# EAGLE board ptzlanc9 (EAGLE 5.06), part 1 of 3
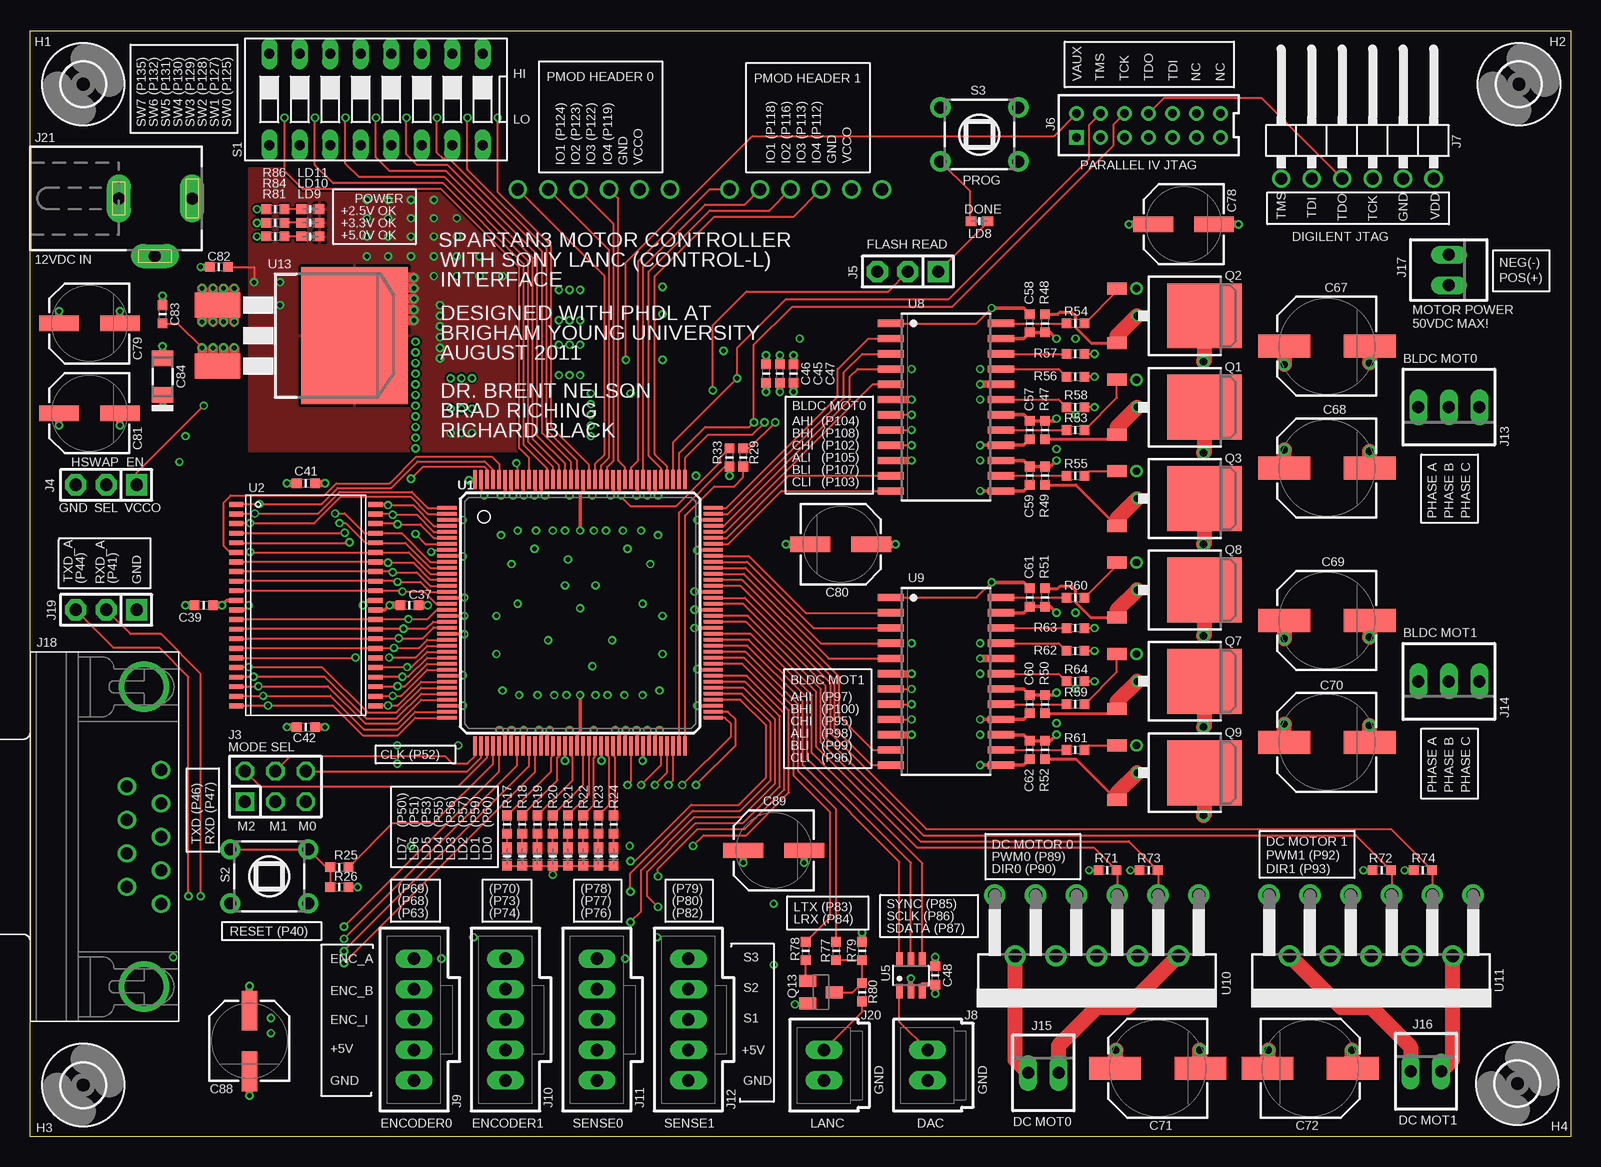
[diagram p0: board, top side]
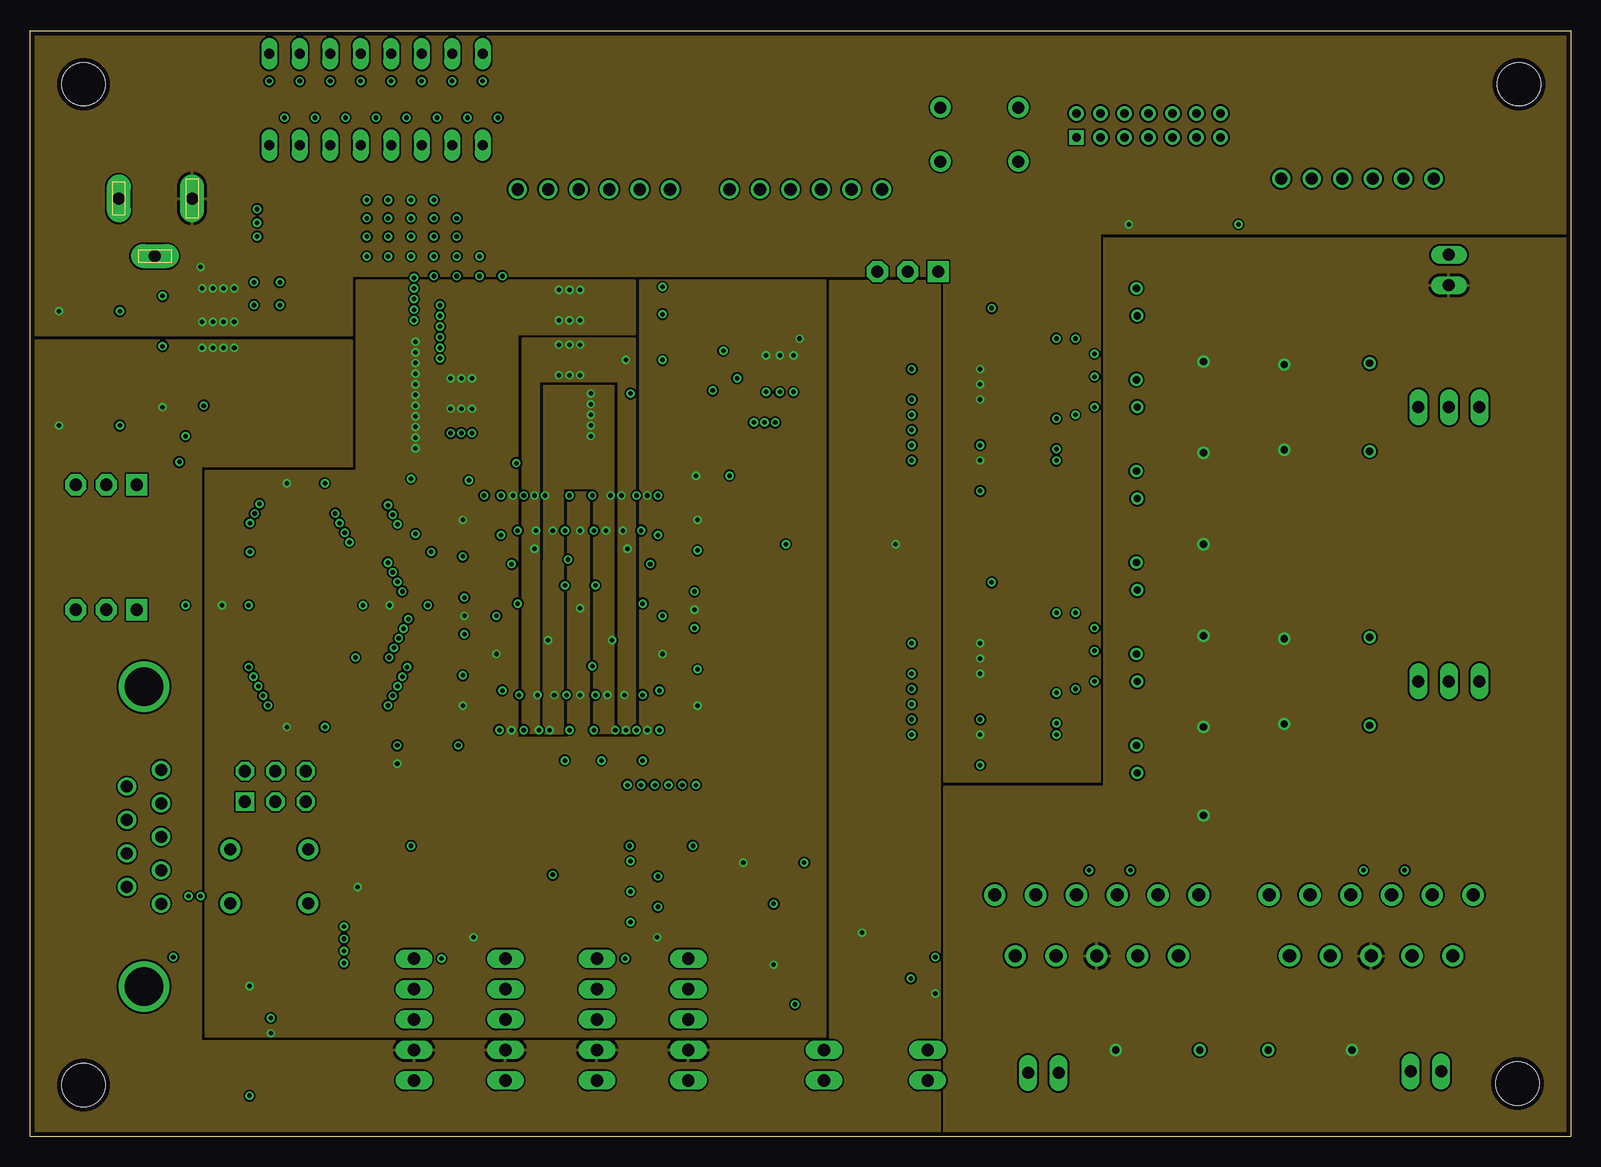
[diagram p1: board, inner layer Power]
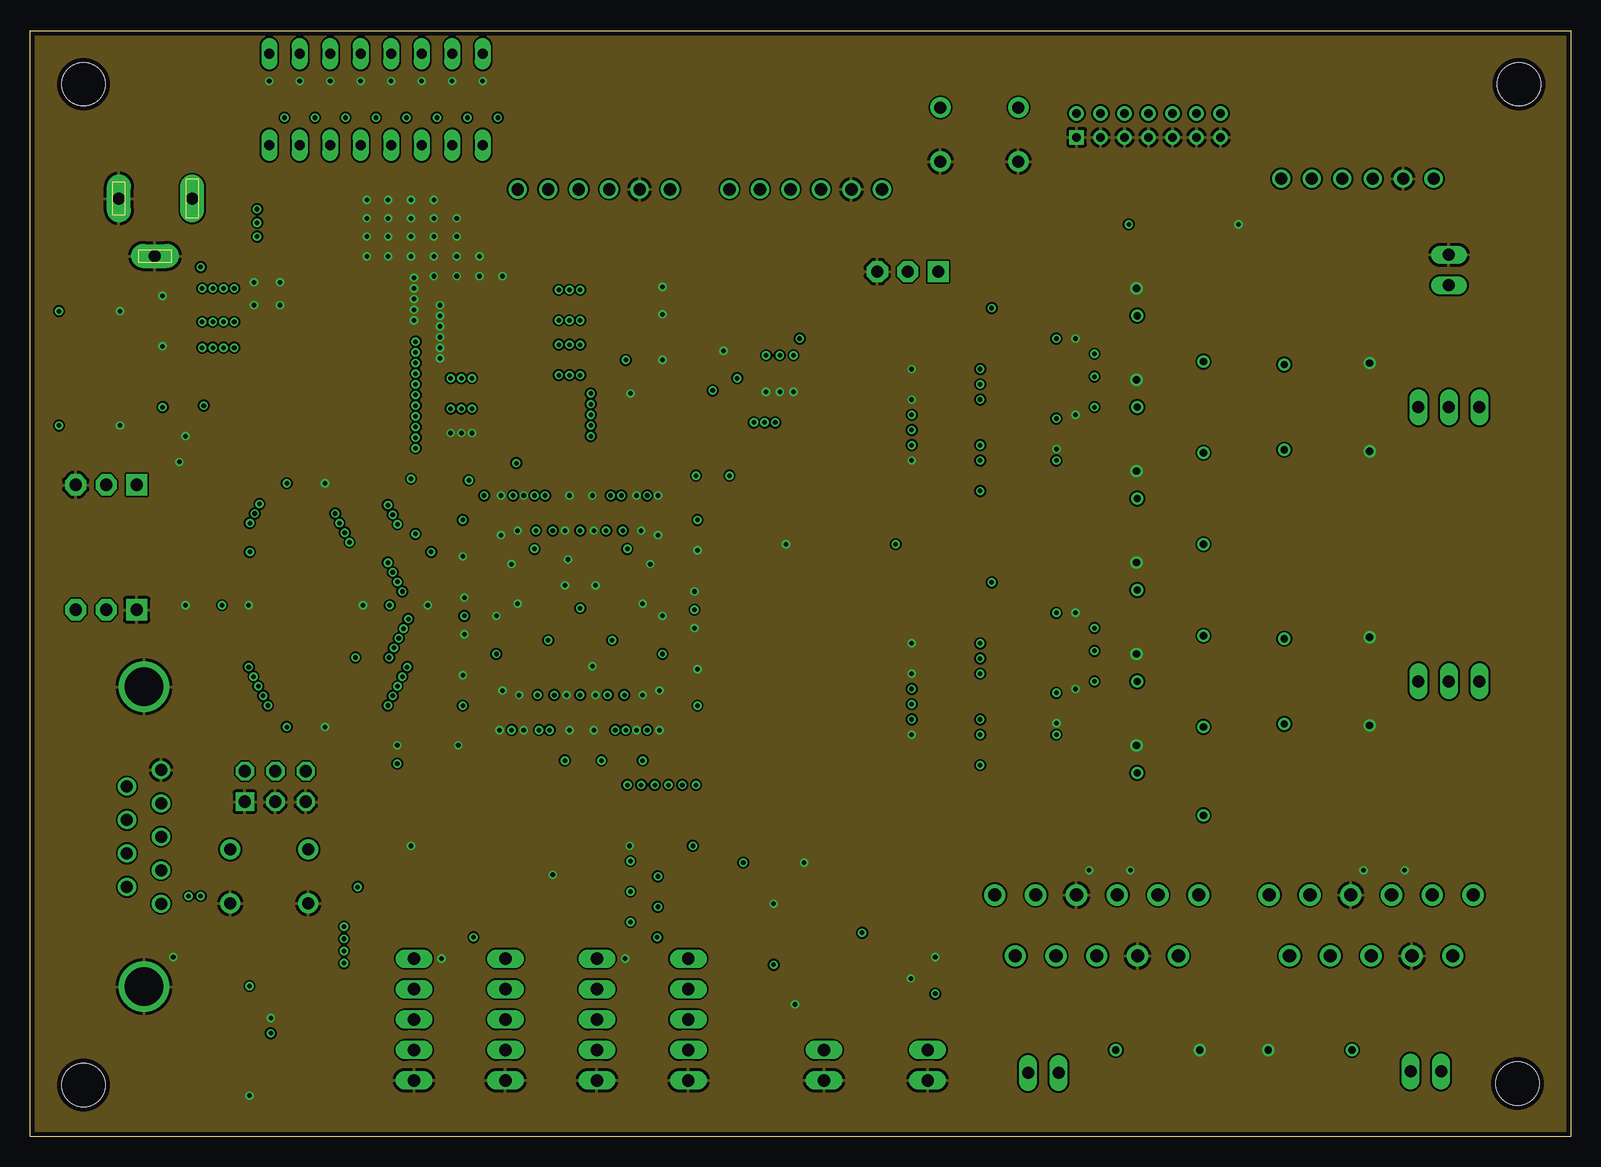
[diagram p2: board, inner layer Ground]
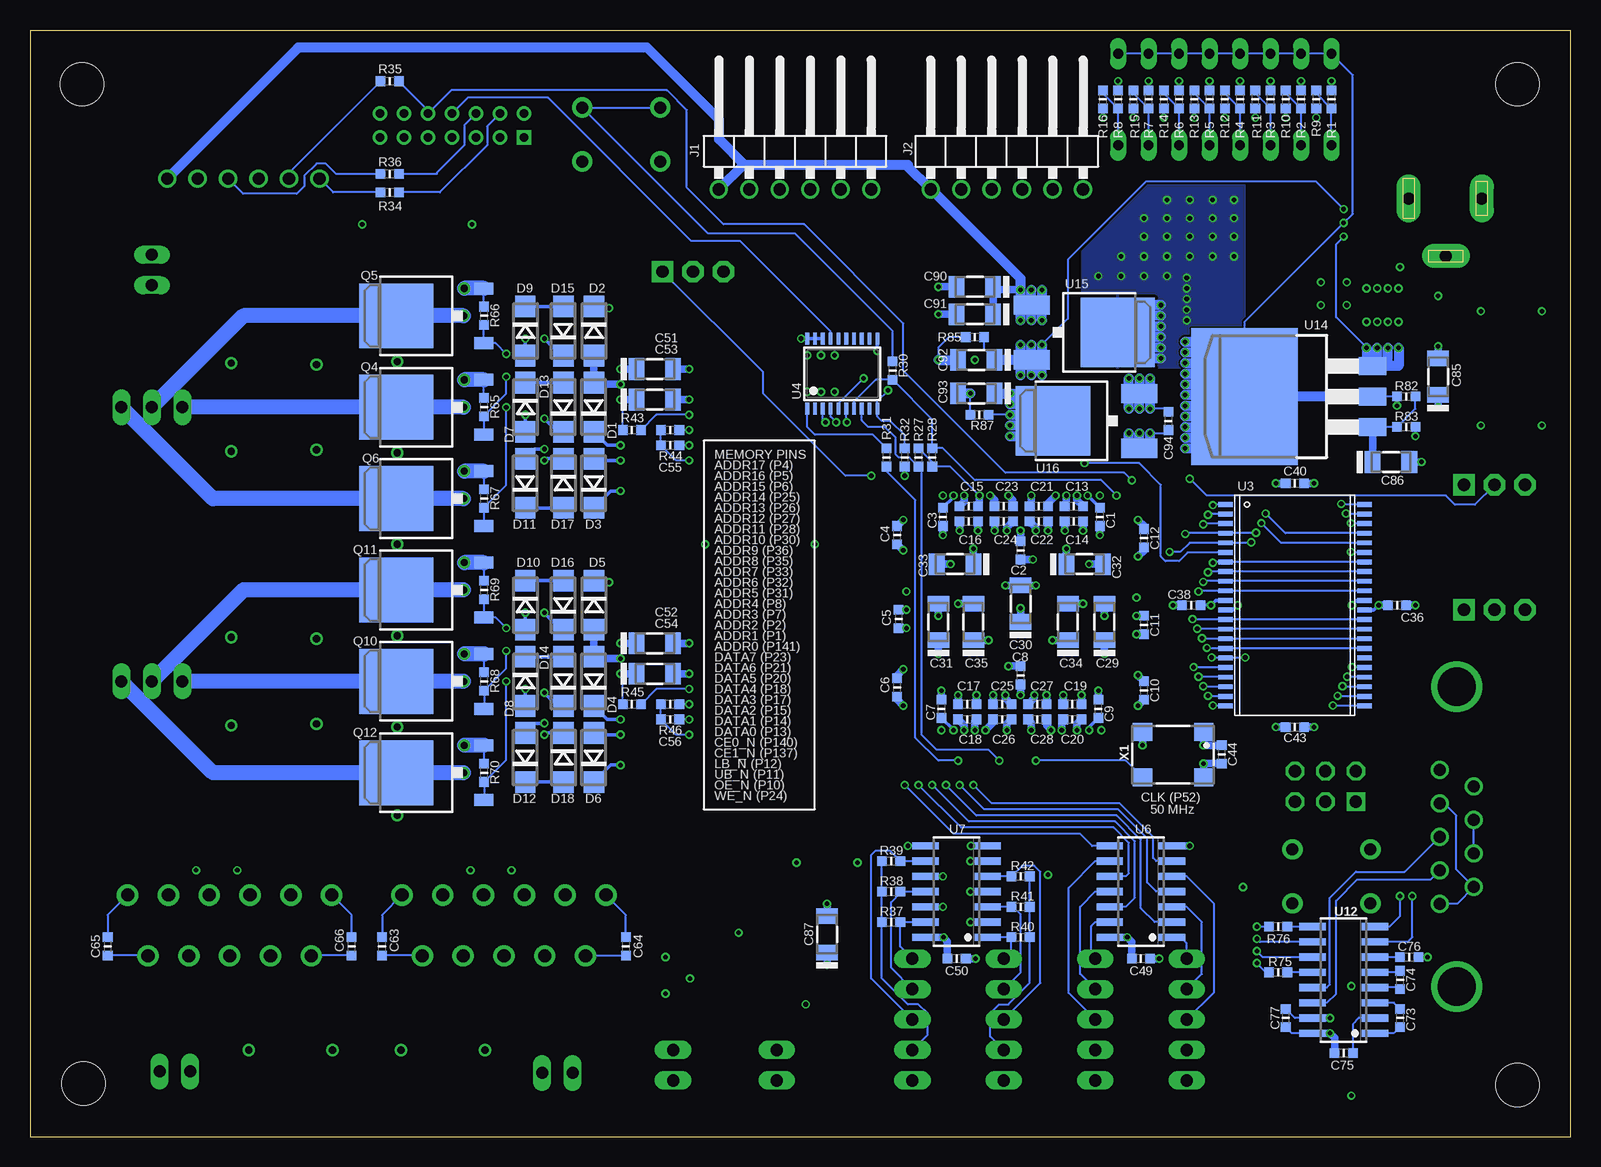
[diagram p3: board, bottom side, seen from below]

Size 128.4 x 92.2 mm. Coordinates in mm from the lower left corner, seen from the top.
Outline: 0,0 0,92.2 128.4,92.2 128.4,0 0,0
Copper layers (1+2*3+16): Top 0.0356mm / dielectric 0.254mm / Power 0.0356mm / dielectric 0.9906mm / Ground 0.0356mm / dielectric 0.254mm / Bottom 0.0356mm
Design rules "Advanced-Circuits-66Special-4layer *": minimum track width 6mil, minimum drill 15mil, track to track 6mil, track to pad 6mil, pad to pad 6mil, via to via 6mil, smd to smd 0mil, copper to edge 15mil, drill to drill 15mil, minimum pad ring 10mil, minimum via ring 6mil, stop-mask expansion 0mil, vias tented up to drill 0mil, thermal gap 10mil

## Footprints (pad centres in the part's own frame; a part is rotated, then mirrored left to right if it is on the bottom)
C0603MP = smd 0.8 x 0.8: 1 -0.762,0; 2 0.762,0
C1206MP/T = smd 1.3 x 1.8: + 1.524,0; - -1.524,0
CSV-E/F = smd 4.318 x 1.93: + -3.556,0; - 3.556,0
CSV-D = smd 3.302 x 1.27: + -2.54,0; - 2.54,0
DO214AC = smd 1.8 x 1.7: A 2.05,0; C -2.05,0
3,6 = hole 3.6: 0,0
1X06/90 = drill 1.016 round: 1 -6.35,-3.81; 2 -3.81,-3.81; 3 -1.27,-3.81; 4 1.27,-3.81; 5 3.81,-3.81; 6 6.35,-3.81
DIL-100-2X03 = drill 1.016 square: 1 -2.54,-1.27 | drill 1.016 octagon: 2 -2.54,1.27; 3 0,-1.27; 4 0,1.27; 5 2.54,-1.27; 6 2.54,1.27
SIP-100-03-40 = drill 1.016 pad 1.778 square: 1 -2.54,0 | drill 1.016 pad 1.778 octagon: 2 0,0; 3 2.54,0
79107-14 = drill 0.711 square: 1 -6,-1 | drill 0.711 round: 2 -6,1; 3 -4,-1; 4 -4,1; 5 -2,-1; 6 -2,1; 7 0,-1; 8 0,1; 9 2,-1; 10 2,1; 11 4,-1; 12 4,1; 13 6,-1; 14 6,1
70543-02 = drill 1.016 long: 1 -1.27,0; 2 1.27,0
70543-05 = drill 1.016 long: 1 -5.08,0; 2 -2.54,0; 3 0,0; 4 2.54,0; 5 5.08,0
22-23-2031 = drill 1 long: 1 -2.54,0; 2 0,0; 3 2.54,0
22-23-2021 = drill 1 long: 1 -1.27,0; 2 1.27,0
09HP = drill 1 round: 1 -5.58,-10.92; 2 -2.79,-10.92; 3 0,-10.92; 4 2.79,-10.92; 5 5.58,-10.92; 6 -4.185,-8.08; 7 -1.395,-8.08; 8 1.395,-8.08; 9 4.185,-8.08 | drill 3.2 round: G1 -12.5,-9.5; G2 12.5,-9.5
DCJ0202 = drill 1 pad 2 long: 1 0,3.1; 2 4.8,0; 3 0,-3
0603MP = smd 0.8 x 0.8: A -0.762,0; C 0.762,0
TO252 = smd 1 x 1.6: 1 -2.28,-4.8; 2 2.28,-4.8 | smd 5.4 x 6.2: 3 0,2.5
SOT23-BEC = smd 1 x 1.4: B -0.95,-1.1; C 0,1.1; E 0.95,-1.1
R0603MP = smd 0.8 x 0.8: 1 -0.762,0; 2 0.762,0
DS-08 = drill 0.813 long: 1 -8.89,-3.81; 2 -6.35,-3.81; 3 -3.81,-3.81; 4 -1.27,-3.81; 5 1.27,-3.81; 6 3.81,-3.81; 7 6.35,-3.81; 8 8.89,-3.81; 9 8.89,3.81; 10 6.35,3.81; 11 3.81,3.81; 12 1.27,3.81; 13 -1.27,3.81; 14 -3.81,3.81; 15 -6.35,3.81; 16 -8.89,3.81
TL1105T = drill 1 pad 1.676 round: 1 -2.25,3.25; 2 2.25,3.25; 3 -2.25,-3.25; 4 2.25,-3.25
TQ144 = smd 1.6 x 0.3: P1 -11.1,8.75; P2 -11.1,8.25; P3 -11.1,7.75; P4 -11.1,7.25; P5 -11.1,6.75; P6 -11.1,6.25; P7 -11.1,5.75; P8 -11.1,5.25; P9 -11.1,4.75; P10 -11.1,4.25; P11 -11.1,3.75; P12 -11.1,3.25; P13 -11.1,2.75; P14 -11.1,2.25; P15 -11.1,1.75; P16 -11.1,1.25; P17 -11.1,0.75; P18 -11.1,0.25; P19 -11.1,-0.25; P20 -11.1,-0.75; P21 -11.1,-1.25; P22 -11.1,-1.75; P23 -11.1,-2.25; P24 -11.1,-2.75; P25 -11.1,-3.25; P26 -11.1,-3.75; P27 -11.1,-4.25; P28 -11.1,-4.75; P29 -11.1,-5.25; P30 -11.1,-5.75; P31 -11.1,-6.25; P32 -11.1,-6.75; P33 -11.1,-7.25; P34 -11.1,-7.75; P35 -11.1,-8.25; P36 -11.1,-8.75; P73 11.1,-8.75; P74 11.1,-8.25; P75 11.1,-7.75; P76 11.1,-7.25; P77 11.1,-6.75; P78 11.1,-6.25; P79 11.1,-5.75; P80 11.1,-5.25; P81 11.1,-4.75; P82 11.1,-4.25; P83 11.1,-3.75; P84 11.1,-3.25; P85 11.1,-2.75; P86 11.1,-2.25; P87 11.1,-1.75; P88 11.1,-1.25; P89 11.1,-0.75; P90 11.1,-0.25; P91 11.1,0.25; P92 11.1,0.75; P93 11.1,1.25; P94 11.1,1.75; P95 11.1,2.25; P96 11.1,2.75; P97 11.1,3.25; P98 11.1,3.75; P99 11.1,4.25; P100 11.1,4.75; P101 11.1,5.25; P102 11.1,5.75; P103 11.1,6.25; P104 11.1,6.75; P105 11.1,7.25; P106 11.1,7.75; P107 11.1,8.25; P108 11.1,8.75 | smd 0.3 x 1.6: P37 -8.75,-11.1; P38 -8.25,-11.1; P39 -7.75,-11.1; P40 -7.25,-11.1; P41 -6.75,-11.1; P42 -6.25,-11.1; P43 -5.75,-11.1; P44 -5.25,-11.1; P45 -4.75,-11.1; P46 -4.25,-11.1; P47 -3.75,-11.1; P48 -3.25,-11.1; P49 -2.75,-11.1; P50 -2.25,-11.1; P51 -1.75,-11.1; P52 -1.25,-11.1; P53 -0.75,-11.1; P54 -0.25,-11.1; P55 0.25,-11.1; P56 0.75,-11.1; P57 1.25,-11.1; P58 1.75,-11.1; P59 2.25,-11.1; P60 2.75,-11.1; P61 3.25,-11.1; P62 3.75,-11.1; P63 4.25,-11.1; P64 4.75,-11.1; P65 5.25,-11.1; P66 5.75,-11.1; P67 6.25,-11.1; P68 6.75,-11.1; P69 7.25,-11.1; P70 7.75,-11.1; P71 8.25,-11.1; P72 8.75,-11.1; P109 8.75,11.1; P110 8.25,11.1; P111 7.75,11.1; P112 7.25,11.1; P113 6.75,11.1; P114 6.25,11.1; P115 5.75,11.1; P116 5.25,11.1; P117 4.75,11.1; P118 4.25,11.1; P119 3.75,11.1; P120 3.25,11.1; P121 2.75,11.1; P122 2.25,11.1; P123 1.75,11.1; P124 1.25,11.1; P125 0.75,11.1; P126 0.25,11.1; P127 -0.25,11.1; P128 -0.75,11.1; P129 -1.25,11.1; P130 -1.75,11.1; P131 -2.25,11.1; P132 -2.75,11.1; P133 -3.25,11.1; P134 -3.75,11.1; P135 -4.25,11.1; P136 -4.75,11.1; P137 -5.25,11.1; P138 -5.75,11.1; P139 -6.25,11.1; P140 -6.75,11.1; P141 -7.25,11.1; P142 -7.75,11.1; P143 -8.25,11.1; P144 -8.75,11.1
TSOPII44 = smd 0.4 x 1.2: 1 -8.4,-5.8; 2 -7.6,-5.8; 3 -6.8,-5.8; 4 -6,-5.8; 5 -5.2,-5.8; 6 -4.4,-5.8; 7 -3.6,-5.8; 8 -2.8,-5.8; 9 -2,-5.8; 10 -1.2,-5.8; 11 -0.4,-5.8; 12 0.4,-5.8; 13 1.2,-5.8; 14 2,-5.8; 15 2.8,-5.8; 16 3.6,-5.8; 17 4.4,-5.8; 18 5.2,-5.8; 19 6,-5.8; 20 6.8,-5.8; 21 7.6,-5.8; 22 8.4,-5.8; 23 8.4,5.8; 24 7.6,5.8; 25 6.8,5.8; 26 6,5.8; 27 5.2,5.8; 28 4.4,5.8; 29 3.6,5.8; 30 2.8,5.8; 31 2,5.8; 32 1.2,5.8; 33 0.4,5.8; 34 -0.4,5.8; 35 -1.2,5.8; 36 -2,5.8; 37 -2.8,5.8; 38 -3.6,5.8; 39 -4.4,5.8; 40 -5.2,5.8; 41 -6,5.8; 42 -6.8,5.8; 43 -7.6,5.8; 44 -8.4,5.8
TSSOP20 = smd 0.305 x 0.991: 1 -2.925,-2.918; 2 -2.275,-2.918; 3 -1.625,-2.918; 4 -0.975,-2.918; 5 -0.325,-2.918; 6 0.325,-2.918; 7 0.975,-2.918; 8 1.625,-2.918; 9 2.275,-2.918; 10 2.925,-2.918; 11 2.925,2.918; 12 2.275,2.918; 13 1.625,2.918; 14 0.975,2.918; 15 0.325,2.918; 16 -0.325,2.918; 17 -0.975,2.918; 18 -1.625,2.918; 19 -2.275,2.918; 20 -2.925,2.918
SOT23-6 = smd 0.55 x 1.2: 1 -0.95,-1.3; 2 0,-1.3; 3 0.95,-1.3; 4 0.95,1.3; 5 0,1.3; 6 -0.95,1.3
SO14 = smd 0.6 x 2.2: 1 -3.81,-2.6; 2 -2.54,-2.6; 3 -1.27,-2.6; 4 0,-2.6; 5 1.27,-2.6; 6 2.54,-2.6; 7 3.81,-2.6; 8 3.81,2.6; 9 2.54,2.6; 10 1.27,2.6; 11 0,2.6; 12 -1.27,2.6; 13 -2.54,2.6; 14 -3.81,2.6
SO24W = smd 0.6 x 2.2: 1 -6.985,-4.6; 2 -5.715,-4.6; 3 -4.445,-4.6; 4 -3.175,-4.6; 5 -1.905,-4.6; 6 -0.635,-4.6; 7 0.635,-4.6; 8 1.905,-4.6; 9 3.175,-4.6; 10 4.445,-4.6; 11 5.715,-4.6; 12 6.985,-4.6; 13 6.985,4.6; 14 5.715,4.6; 15 4.445,4.6; 16 3.175,4.6; 17 1.905,4.6; 18 0.635,4.6; 19 -0.635,4.6; 20 -1.905,4.6; 21 -3.175,4.6; 22 -4.445,4.6; 23 -5.715,4.6; 24 -6.985,4.6
TO-220-11 = drill 1.1 pad 1.778 round: 1 -8.5,-9.37; 2 -6.8,-4.29; 3 -5.1,-9.37; 4 -3.4,-4.29; 5 -1.7,-9.37; 6 0,-4.29; 7 1.7,-9.37; 8 3.4,-4.29; 9 5.1,-9.37; 10 6.8,-4.29; 11 8.5,-9.37
SO16 = smd 0.6 x 2.2: 1 -4.445,-2.6; 2 -3.175,-2.6; 3 -1.905,-2.6; 4 -0.635,-2.6; 5 0.635,-2.6; 6 1.905,-2.6; 7 3.175,-2.6; 8 4.445,-2.6; 9 4.445,2.6; 10 3.175,2.6; 11 1.905,2.6; 12 0.635,2.6; 13 -0.635,2.6; 14 -1.905,2.6; 15 -3.175,2.6; 16 -4.445,2.6
D2PACK = smd 2.083 x 3.81: 1 -2.54,-8.89; 3 2.54,-8.89 | smd 11.43 x 8.89: 2 0,2.54
TO263 = smd 1.524 x 2.286: 1 -2.54,0; 2 0,0; 3 2.54,0 | smd 11.43 x 8.89: TAB 0,10.668
DPACK = smd 1.6 x 3: 1 -2.28,-4.8; 3 2.28,-4.8 | smd 5.8 x 6.2: 4 0,2.38
SM77H = smd 1.6 x 1.5: 1 -2.55,-1.9; 2 2.55,-1.9; 3 2.55,1.9; 4 -2.55,1.9

## Placement (x,y rotation side)
C1  0.047u  [C0603MP]  39.24,51.69 90 bottom
C2  0.047u  [C0603MP]  45.85,48.9 90 bottom
C3  0.047u  [C0603MP]  52.32,51.69 90 bottom
C4  0.047u  [C0603MP]  56.13,50.16 90 bottom
C5  0.047u  [C0603MP]  56.01,43.18 90 bottom
C6  0.047u  [C0603MP]  56.13,37.47 270 bottom
C7  0.047u  [C0603MP]  52.45,35.69 270 bottom
C8  0.047u  [C0603MP]  45.85,38.48 270 bottom
C9  0.047u  [C0603MP]  39.37,35.69 270 bottom
C10  0.047u  [C0603MP]  35.56,37.21 270 bottom
C11  0.047u  [C0603MP]  35.56,42.67 90 bottom
C12  0.047u  [C0603MP]  35.56,49.91 90 bottom
C13  0.01u  [C0603MP]  41.4,52.58 180 bottom
C14  0.01u  [C0603MP]  41.4,51.31 180 bottom
C15  0.01u  [C0603MP]  50.16,52.58 0 bottom
C16  0.01u  [C0603MP]  50.16,51.31 0 bottom
C17  0.01u  [C0603MP]  50.29,36.07 0 bottom
C18  0.01u  [C0603MP]  50.29,34.8 0 bottom
C19  0.01u  [C0603MP]  41.53,36.07 180 bottom
C20  0.01u  [C0603MP]  41.53,34.8 180 bottom
C21  0.047u  [C0603MP]  44.32,52.58 0 bottom
C22  0.047u  [C0603MP]  44.32,51.31 0 bottom
C23  0.047u  [C0603MP]  47.24,52.58 180 bottom
C24  0.047u  [C0603MP]  47.24,51.31 180 bottom
C25  0.01u  [C0603MP]  47.37,36.07 180 bottom
C26  0.01u  [C0603MP]  47.37,34.8 180 bottom
C27  0.01u  [C0603MP]  44.45,36.07 0 bottom
C28  0.01u  [C0603MP]  44.45,34.8 0 bottom
C29  10u  [C1206MP/T]  38.86,42.93 270 bottom
C30  10u  [C1206MP/T]  45.85,44.45 270 bottom
C31  10u  [C1206MP/T]  52.7,42.93 270 bottom
C32  10u  [C1206MP/T]  40.51,47.75 180 bottom
C33  10u  [C1206MP/T]  51.31,47.75 0 bottom
C34  10u  [C1206MP/T]  41.91,42.93 270 bottom
C35  10u  [C1206MP/T]  49.78,42.93 270 bottom
C36  0.047u  [C0603MP]  14.48,44.32 180 bottom
C37  0.047u  [C0603MP]  31.62,44.32 180 top
C38  0.047u  [C0603MP]  31.62,44.32 0 bottom
C39  0.047u  [C0603MP]  14.48,44.32 0 top
C40  0.047u  [C0603MP]  22.99,54.48 0 bottom
C41  0.047u  [C0603MP]  22.99,54.48 180 top
C42  0.047u  [C0603MP]  22.99,34.16 180 top
C43  0.047u  [C0603MP]  22.99,34.16 0 bottom
C44  0.01u  [C0603MP]  29.08,31.88 270 bottom
C45  0.047u  [C0603MP]  62.48,63.63 90 top
C46  0.047u  [C0603MP]  61.34,63.63 90 top
C47  0.047u  [C0603MP]  63.63,63.63 90 top
C48  0.1u  [C0603MP]  75.44,13.46 270 top
C49  0.1u  [C0603MP]  35.81,14.86 180 bottom
C50  0.1u  [C0603MP]  51.18,14.86 180 bottom
C51  4.7u  [C1206MP/T]  76.33,64.01 180 bottom
C52  4.7u  [C1206MP/T]  76.33,41.15 180 bottom
C53  1u  [C1206MP/T]  76.33,61.47 180 bottom
C54  1u  [C1206MP/T]  76.33,38.61 180 bottom
C55  470p  [C0603MP]  75.06,57.66 180 bottom
C56  470p  [C0603MP]  75.06,34.8 180 bottom
C57  0.22u  [C0603MP]  83.31,58.93 270 top
C58  0.22u  [C0603MP]  83.31,67.82 90 top
C59  0.22u  [C0603MP]  83.31,55.12 270 top
C60  0.22u  [C0603MP]  83.31,36.07 270 top
C61  0.22u  [C0603MP]  83.31,44.96 90 top
C62  0.22u  [C0603MP]  83.31,32.26 270 top
C63  0.01u  [C0603MP]  99.06,15.88 90 bottom
C64  0.01u  [C0603MP]  78.74,15.88 90 bottom
C65  0.01u  [C0603MP]  121.92,15.88 90 bottom
C66  0.01u  [C0603MP]  101.6,15.88 90 bottom
C67  47u  [CSV-E/F]  108.08,65.91 0 top
C68  47u  [CSV-E/F]  108.08,55.75 0 top
C69  47u  [CSV-E/F]  108.08,43.05 0 top
C70  47u  [CSV-E/F]  108.08,32.89 0 top
C71  47u  [CSV-E/F]  93.98,5.71 0 top
C72  47u  [CSV-E/F]  106.68,5.71 180 top
C73  0.1u  [C0603MP]  14.22,9.91 270 bottom
C74  0.1u  [C0603MP]  14.22,13.08 270 bottom
C75  0.1u  [C0603MP]  18.92,6.99 180 bottom
C76  0.1u  [C0603MP]  13.46,14.99 180 bottom
C77  0.1u  [C0603MP]  23.75,9.91 270 bottom
C78  100u  [CSV-D]  96.14,76.07 0 top
C79  100u  [CSV-D]  4.95,67.82 0 top
C80  100u  [CSV-D]  67.56,49.4 180 top
C81  100u  [CSV-D]  4.95,60.33 0 top
C82  0.33u  [C0603MP]  15.75,72.52 180 top
C83  0.1u  [C0603MP]  11.05,68.58 270 top
C84  22u  [C1206MP/T]  11.05,63.37 270 top
C85  10u  [C1206MP/T]  11.05,63.37 270 bottom
C86  10u  [C1206MP/T]  14.99,56.26 180 bottom
C87  10u  [C1206MP/T]  61.98,16.89 270 bottom
C88  100u  [CSV-D]  18.29,8 270 top
C89  100u  [CSV-D]  61.98,23.88 0 top
C90  22u  [C1206MP/T]  49.66,70.87 0 bottom
C91  0.1u  [C1206MP/T]  49.66,68.58 0 bottom
C92  10u  [C1206MP/T]  49.53,64.77 0 bottom
C93  22u  [C1206MP/T]  49.53,61.98 0 bottom
C94  0.01u  [C0603MP]  33.53,59.69 90 bottom
D1  [DO214AC]  81.41,60.83 90 bottom
D2  [DO214AC]  81.41,67.18 270 bottom
D3  [DO214AC]  81.41,54.48 90 bottom
D4  [DO214AC]  81.41,37.97 90 bottom
D5  [DO214AC]  81.41,44.32 270 bottom
D6  [DO214AC]  81.41,31.62 90 bottom
D7  [DO214AC]  87.12,60.83 270 bottom
D8  [DO214AC]  87.12,37.97 270 bottom
D9  [DO214AC]  87.12,67.18 270 bottom
D10  [DO214AC]  87.12,44.32 270 bottom
D11  [DO214AC]  87.12,54.48 90 bottom
D12  [DO214AC]  87.12,31.62 90 bottom
D13  [DO214AC]  83.95,60.83 90 bottom
D14  [DO214AC]  83.95,37.97 90 bottom
D15  [DO214AC]  83.95,67.18 90 bottom
D16  [DO214AC]  83.95,44.32 90 bottom
D17  [DO214AC]  83.95,54.48 270 bottom
D18  [DO214AC]  83.95,31.62 270 bottom
H1  [3,6]  4.45,87.76 0 top
H2  [3,6]  124.08,87.76 0 top
H3  [3,6]  4.45,4.32 0 top
H4  [3,6]  123.95,4.45 0 top
J1  [1X06/90]  64.64,82.8 0 bottom
J2  [1X06/90]  46.99,82.8 0 bottom
J3  [DIL-100-2X03]  20.45,29.21 0 top
J4  [SIP-100-03-40]  6.35,54.36 180 top
J5  [SIP-100-03-40]  73.15,72.14 180 top
J6  [79107-14]  93.22,84.33 0 top
J7  [1X06/90]  110.62,83.69 0 top
J8  [70543-02]  74.8,5.97 90 top
J9  [70543-05]  32,9.78 90 top
J10  [70543-05]  39.62,9.78 90 top
J11  [70543-05]  47.24,9.78 90 top
J12  [70543-05]  54.86,9.78 90 top
J13  [22-23-2031]  118.24,60.83 180 top
J14  [22-23-2031]  118.24,37.97 180 top
J15  [22-23-2021]  84.45,5.33 0 top
J16  [22-23-2021]  116.33,5.46 0 top
J17  [22-23-2021]  118.24,72.26 270 top
J18  [09HP]  0,25.02 90 top
J19  [SIP-100-03-40]  6.35,43.94 180 top
J20  [70543-02]  66.17,5.97 90 top
J21  [DCJ0202]  10.41,78.23 270 top
LD0  [0603MP]  48.64,23.37 270 top
LD1  [0603MP]  47.37,23.37 270 top
LD2  [0603MP]  46.1,23.37 270 top
LD3  [0603MP]  44.83,23.37 270 top
LD4  [0603MP]  43.56,23.37 270 top
LD5  [0603MP]  42.29,23.37 270 top
LD6  [0603MP]  41.02,23.37 270 top
LD7  [0603MP]  39.75,23.37 270 top
LD8  [0603MP]  79.12,76.33 180 top
LD9  [0603MP]  23.37,75.06 0 top
LD10  [0603MP]  23.37,76.2 0 top
LD11  [0603MP]  23.37,77.34 0 top
Q1  [TO252]  95.38,60.83 270 top
Q2  [TO252]  95.38,68.45 270 top
Q3  [TO252]  95.38,53.21 270 top
Q4  [TO252]  95.38,60.83 90 bottom
Q5  [TO252]  95.38,68.45 90 bottom
Q6  [TO252]  95.38,53.21 90 bottom
Q7  [TO252]  95.38,37.97 270 top
Q8  [TO252]  95.38,45.59 270 top
Q9  [TO252]  95.38,30.35 270 top
Q10  [TO252]  95.38,37.97 90 bottom
Q11  [TO252]  95.38,45.59 90 bottom
Q12  [TO252]  95.38,30.35 90 bottom
Q13  [SOT23-BEC]  65.91,12.06 270 top
R1  4.7k  [R0603MP]  19.94,86.49 90 bottom
R2  4.7k  [R0603MP]  22.48,86.49 90 bottom
R3  4.7k  [R0603MP]  25.02,86.49 90 bottom
R4  4.7k  [R0603MP]  27.56,86.49 90 bottom
R5  4.7k  [R0603MP]  30.1,86.49 90 bottom
R6  4.7k  [R0603MP]  32.64,86.49 90 bottom
R7  4.7k  [R0603MP]  35.18,86.49 90 bottom
R8  4.7k  [R0603MP]  37.72,86.49 90 bottom
R9  4.7k  [R0603MP]  21.21,86.49 270 bottom
R10  4.7k  [R0603MP]  23.75,86.49 270 bottom
R11  4.7k  [R0603MP]  26.29,86.49 270 bottom
R12  4.7k  [R0603MP]  28.83,86.49 270 bottom
R13  4.7k  [R0603MP]  31.37,86.49 270 bottom
R14  4.7k  [R0603MP]  33.91,86.49 270 bottom
R15  4.7k  [R0603MP]  36.45,86.49 270 bottom
R16  4.7k  [R0603MP]  38.99,86.49 270 bottom
R17  390R  [R0603MP]  39.75,26.04 90 top
R18  390R  [R0603MP]  41.02,26.04 90 top
R19  390R  [R0603MP]  42.29,26.04 90 top
R20  390R  [R0603MP]  43.56,26.04 90 top
R21  390R  [R0603MP]  44.83,26.04 90 top
R22  390R  [R0603MP]  46.1,26.04 90 top
R23  390R  [R0603MP]  47.37,26.04 90 top
R24  390R  [R0603MP]  48.64,26.04 90 top
R25  4.7k  [R0603MP]  25.78,22.48 0 top
R26  4.7k  [R0603MP]  25.78,20.83 180 top
R27  4.7k  [R0603MP]  54.36,56.64 270 bottom
R28  4.7k  [R0603MP]  53.21,56.64 90 bottom
R29  270R  [R0603MP]  58.29,56.64 270 top
R30  100R  [R0603MP]  56.52,63.88 90 bottom
R31  100R  [R0603MP]  57.02,56.64 90 bottom
R32  4.7k  [R0603MP]  55.5,56.64 90 bottom
R33  75R  [R0603MP]  59.44,56.64 90 top
R34  100R  [R0603MP]  98.42,78.74 0 bottom
R35  100R  [R0603MP]  98.42,88.01 0 bottom
R36  100R  [R0603MP]  98.42,80.26 0 bottom
R37  1k  [R0603MP]  56.64,17.91 0 bottom
R38  1k  [R0603MP]  56.64,20.45 0 bottom
R39  1k  [R0603MP]  56.64,22.99 0 bottom
R40  1k  [R0603MP]  45.85,16.64 180 bottom
R41  1k  [R0603MP]  45.85,19.18 180 bottom
R42  1k  [R0603MP]  45.85,21.72 180 bottom
R43  22K  [R0603MP]  78.23,58.93 0 bottom
R44  47K  [R0603MP]  75.06,58.93 180 bottom
R45  22K  [R0603MP]  78.23,36.07 0 bottom
R46  47K  [R0603MP]  75.06,36.07 180 bottom
R47  1R  [R0603MP]  84.58,58.93 270 top
R48  1R  [R0603MP]  84.58,67.82 90 top
R49  1R  [R0603MP]  84.58,55.12 270 top
R50  1R  [R0603MP]  84.58,36.07 270 top
R51  1R  [R0603MP]  84.58,44.96 90 top
R52  1R  [R0603MP]  84.58,32.26 270 top
R53  10R  [R0603MP]  87.12,58.93 0 top
R54  10R  [R0603MP]  87.12,67.82 0 top
R55  10R  [R0603MP]  87.12,55.12 0 top
R56  10R  [R0603MP]  87.12,63.37 0 top
R57  10R  [R0603MP]  87.12,65.28 0 top
R58  10R  [R0603MP]  87.12,60.83 0 top
R59  10R  [R0603MP]  87.12,36.07 0 top
R60  10R  [R0603MP]  87.12,44.96 0 top
R61  10R  [R0603MP]  87.12,32.26 0 top
R62  10R  [R0603MP]  87.12,40.51 0 top
R63  10R  [R0603MP]  87.12,42.42 0 top
R64  10R  [R0603MP]  87.12,37.97 0 top
R65  4.7k  [R0603MP]  90.55,60.83 90 bottom
R66  4.7k  [R0603MP]  90.55,68.45 90 bottom
R67  4.7k  [R0603MP]  90.55,53.21 90 bottom
R68  4.7k  [R0603MP]  90.55,37.97 90 bottom
R69  4.7k  [R0603MP]  90.55,45.59 90 bottom
R70  4.7k  [R0603MP]  90.55,30.35 90 bottom
R71  4.7K  [R0603MP]  89.79,22.23 180 top
R72  4.7K  [R0603MP]  112.65,22.23 180 top
R73  4.7K  [R0603MP]  93.22,22.23 180 top
R74  4.7K  [R0603MP]  116.08,22.23 180 top
R75  100R  [R0603MP]  24.38,13.72 0 bottom
R76  100R  [R0603MP]  24.38,17.53 0 bottom
R77  220R  [R0603MP]  67.18,15.49 270 top
R78  1k  [R0603MP]  64.64,15.49 270 top
R79  1k  [R0603MP]  69.34,15.49 270 top
R80  100R  [R0603MP]  69.34,12.06 270 top
R81  1k  [R0603MP]  20.45,75.06 0 top
R82  240R  [R0603MP]  13.72,61.72 0 bottom
R83  390R  [R0603MP]  13.72,59.18 0 bottom
R84  470R  [R0603MP]  20.45,76.2 0 top
R85  2.2k  [R0603MP]  49.66,66.67 180 bottom
R86  270R  [R0603MP]  20.45,77.34 0 top
R87  120R  [R0603MP]  49.28,60.2 180 bottom
S1  [DS-08]  28.83,86.49 180 top
S2  [TL1105T]  19.94,21.72 270 top
S3  [TL1105T]  79.12,83.57 270 top
U1  [TQ144]  45.85,43.69 0 top
U2  [TSOPII44]  22.99,44.32 270 top
U3  [TSOPII44]  22.99,44.32 270 bottom
U4  [TSSOP20]  60.71,63.63 0 bottom
U5  [SOT23-6]  73.41,13.46 0 top
U6  [SO14]  35.81,20.45 90 bottom
U7  [SO14]  51.18,20.45 90 bottom
U8  [SO24W]  76.33,60.83 270 top
U9  [SO24W]  76.33,37.97 270 top
U10  [TO-220-11]  88.9,10.79 180 top
U11  [TO-220-11]  111.76,10.79 180 top
U12  [SO16]  18.92,13.08 90 bottom
U13  [D2PACK]  24.51,66.8 270 top
U14  [TO263]  16.51,61.72 90 bottom
U15  [DPACK]  40.13,67.06 270 bottom
U16  [DPACK]  40.77,59.69 90 bottom
X1  [SM77H]  33.15,31.88 180 bottom

## Library data of the parts
C1 = rc-master-smd; COST: 0.12; DEV_NAME: C0603; INST_NAME: fpga_vcco_small(1); LIBNAME: rc-master-smd; MFGR: TDK; PARTNUMBER: 445-1313-1-ND; PKG_TYPE: C0603MP; REFPREFIX: C; SUPPLIER: DIGI-KEY; VOLTAGE: 50v
C2 = rc-master-smd; COST: 0.12; DEV_NAME: C0603; INST_NAME: fpga_vcco_small(2); LIBNAME: rc-master-smd; MFGR: TDK; PARTNUMBER: 445-1313-1-ND; PKG_TYPE: C0603MP; REFPREFIX: C; SUPPLIER: DIGI-KEY; VOLTAGE: 50v
C3 = rc-master-smd; COST: 0.12; DEV_NAME: C0603; INST_NAME: fpga_vcco_small(3); LIBNAME: rc-master-smd; MFGR: TDK; PARTNUMBER: 445-1313-1-ND; PKG_TYPE: C0603MP; REFPREFIX: C; SUPPLIER: DIGI-KEY; VOLTAGE: 50v
C4 = rc-master-smd; COST: 0.12; DEV_NAME: C0603; INST_NAME: fpga_vcco_small(4); LIBNAME: rc-master-smd; MFGR: TDK; PARTNUMBER: 445-1313-1-ND; PKG_TYPE: C0603MP; REFPREFIX: C; SUPPLIER: DIGI-KEY; VOLTAGE: 50v
C5 = rc-master-smd; COST: 0.12; DEV_NAME: C0603; INST_NAME: fpga_vcco_small(5); LIBNAME: rc-master-smd; MFGR: TDK; PARTNUMBER: 445-1313-1-ND; PKG_TYPE: C0603MP; REFPREFIX: C; SUPPLIER: DIGI-KEY; VOLTAGE: 50v
C6 = rc-master-smd; COST: 0.12; DEV_NAME: C0603; INST_NAME: fpga_vcco_small(6); LIBNAME: rc-master-smd; MFGR: TDK; PARTNUMBER: 445-1313-1-ND; PKG_TYPE: C0603MP; REFPREFIX: C; SUPPLIER: DIGI-KEY; VOLTAGE: 50v
C7 = rc-master-smd; COST: 0.12; DEV_NAME: C0603; INST_NAME: fpga_vcco_small(7); LIBNAME: rc-master-smd; MFGR: TDK; PARTNUMBER: 445-1313-1-ND; PKG_TYPE: C0603MP; REFPREFIX: C; SUPPLIER: DIGI-KEY; VOLTAGE: 50v
C8 = rc-master-smd; COST: 0.12; DEV_NAME: C0603; INST_NAME: fpga_vcco_small(8); LIBNAME: rc-master-smd; MFGR: TDK; PARTNUMBER: 445-1313-1-ND; PKG_TYPE: C0603MP; REFPREFIX: C; SUPPLIER: DIGI-KEY; VOLTAGE: 50v
C9 = rc-master-smd; COST: 0.12; DEV_NAME: C0603; INST_NAME: fpga_vcco_small(9); LIBNAME: rc-master-smd; MFGR: TDK; PARTNUMBER: 445-1313-1-ND; PKG_TYPE: C0603MP; REFPREFIX: C; SUPPLIER: DIGI-KEY; VOLTAGE: 50v
C10 = rc-master-smd; COST: 0.12; DEV_NAME: C0603; INST_NAME: fpga_vcco_small(10); LIBNAME: rc-master-smd; MFGR: TDK; PARTNUMBER: 445-1313-1-ND; PKG_TYPE: C0603MP; REFPREFIX: C; SUPPLIER: DIGI-KEY; VOLTAGE: 50v
C11 = rc-master-smd; COST: 0.12; DEV_NAME: C0603; INST_NAME: fpga_vcco_small(11); LIBNAME: rc-master-smd; MFGR: TDK; PARTNUMBER: 445-1313-1-ND; PKG_TYPE: C0603MP; REFPREFIX: C; SUPPLIER: DIGI-KEY; VOLTAGE: 50v
C12 = rc-master-smd; COST: 0.12; DEV_NAME: C0603; INST_NAME: fpga_vcco_small(12); LIBNAME: rc-master-smd; MFGR: TDK; PARTNUMBER: 445-1313-1-ND; PKG_TYPE: C0603MP; REFPREFIX: C; SUPPLIER: DIGI-KEY; VOLTAGE: 50v
C13 = rc-master-smd; COST: 0.08; DEV_NAME: C0603; INST_NAME: fpga_vccaux_small(1); LIBNAME: rc-master-smd; MFGR: TDK; PARTNUMBER: 445-1311-1-ND; PKG_TYPE: C0603MP; REFPREFIX: C; SUPPLIER: DIGI-KEY; VOLTAGE: 50v
C14 = rc-master-smd; COST: 0.08; DEV_NAME: C0603; INST_NAME: fpga_vccaux_small(2); LIBNAME: rc-master-smd; MFGR: TDK; PARTNUMBER: 445-1311-1-ND; PKG_TYPE: C0603MP; REFPREFIX: C; SUPPLIER: DIGI-KEY; VOLTAGE: 50v
C15 = rc-master-smd; COST: 0.08; DEV_NAME: C0603; INST_NAME: fpga_vccaux_small(3); LIBNAME: rc-master-smd; MFGR: TDK; PARTNUMBER: 445-1311-1-ND; PKG_TYPE: C0603MP; REFPREFIX: C; SUPPLIER: DIGI-KEY; VOLTAGE: 50v
C16 = rc-master-smd; COST: 0.08; DEV_NAME: C0603; INST_NAME: fpga_vccaux_small(4); LIBNAME: rc-master-smd; MFGR: TDK; PARTNUMBER: 445-1311-1-ND; PKG_TYPE: C0603MP; REFPREFIX: C; SUPPLIER: DIGI-KEY; VOLTAGE: 50v
C17 = rc-master-smd; COST: 0.08; DEV_NAME: C0603; INST_NAME: fpga_vccaux_small(5); LIBNAME: rc-master-smd; MFGR: TDK; PARTNUMBER: 445-1311-1-ND; PKG_TYPE: C0603MP; REFPREFIX: C; SUPPLIER: DIGI-KEY; VOLTAGE: 50v
C18 = rc-master-smd; COST: 0.08; DEV_NAME: C0603; INST_NAME: fpga_vccaux_small(6); LIBNAME: rc-master-smd; MFGR: TDK; PARTNUMBER: 445-1311-1-ND; PKG_TYPE: C0603MP; REFPREFIX: C; SUPPLIER: DIGI-KEY; VOLTAGE: 50v
C19 = rc-master-smd; COST: 0.08; DEV_NAME: C0603; INST_NAME: fpga_vccaux_small(7); LIBNAME: rc-master-smd; MFGR: TDK; PARTNUMBER: 445-1311-1-ND; PKG_TYPE: C0603MP; REFPREFIX: C; SUPPLIER: DIGI-KEY; VOLTAGE: 50v
C20 = rc-master-smd; COST: 0.08; DEV_NAME: C0603; INST_NAME: fpga_vccaux_small(8); LIBNAME: rc-master-smd; MFGR: TDK; PARTNUMBER: 445-1311-1-ND; PKG_TYPE: C0603MP; REFPREFIX: C; SUPPLIER: DIGI-KEY; VOLTAGE: 50v
C21 = rc-master-smd; COST: 0.12; DEV_NAME: C0603; INST_NAME: fpga_vccint_small(1); LIBNAME: rc-master-smd; MFGR: TDK; PARTNUMBER: 445-1313-1-ND; PKG_TYPE: C0603MP; REFPREFIX: C; SUPPLIER: DIGI-KEY; VOLTAGE: 50v
C22 = rc-master-smd; COST: 0.12; DEV_NAME: C0603; INST_NAME: fpga_vccint_small(2); LIBNAME: rc-master-smd; MFGR: TDK; PARTNUMBER: 445-1313-1-ND; PKG_TYPE: C0603MP; REFPREFIX: C; SUPPLIER: DIGI-KEY; VOLTAGE: 50v
C23 = rc-master-smd; COST: 0.12; DEV_NAME: C0603; INST_NAME: fpga_vccint_small(3); LIBNAME: rc-master-smd; MFGR: TDK; PARTNUMBER: 445-1313-1-ND; PKG_TYPE: C0603MP; REFPREFIX: C; SUPPLIER: DIGI-KEY; VOLTAGE: 50v
C24 = rc-master-smd; COST: 0.12; DEV_NAME: C0603; INST_NAME: fpga_vccint_small(4); LIBNAME: rc-master-smd; MFGR: TDK; PARTNUMBER: 445-1313-1-ND; PKG_TYPE: C0603MP; REFPREFIX: C; SUPPLIER: DIGI-KEY; VOLTAGE: 50v
C25 = rc-master-smd; COST: 0.08; DEV_NAME: C0603; INST_NAME: fpga_vccint_small(5); LIBNAME: rc-master-smd; MFGR: TDK; PARTNUMBER: 445-1311-1-ND; PKG_TYPE: C0603MP; REFPREFIX: C; SUPPLIER: DIGI-KEY; VOLTAGE: 50v
C26 = rc-master-smd; COST: 0.08; DEV_NAME: C0603; INST_NAME: fpga_vccint_small(6); LIBNAME: rc-master-smd; MFGR: TDK; PARTNUMBER: 445-1311-1-ND; PKG_TYPE: C0603MP; REFPREFIX: C; SUPPLIER: DIGI-KEY; VOLTAGE: 50v
C27 = rc-master-smd; COST: 0.08; DEV_NAME: C0603; INST_NAME: fpga_vccint_small(7); LIBNAME: rc-master-smd; MFGR: TDK; PARTNUMBER: 445-1311-1-ND; PKG_TYPE: C0603MP; REFPREFIX: C; SUPPLIER: DIGI-KEY; VOLTAGE: 50v
C28 = rc-master-smd; COST: 0.08; DEV_NAME: C0603; INST_NAME: fpga_vccint_small(8); LIBNAME: rc-master-smd; MFGR: TDK; PARTNUMBER: 445-1311-1-ND; PKG_TYPE: C0603MP; REFPREFIX: C; SUPPLIER: DIGI-KEY; VOLTAGE: 50v
C29 = rc-master-smd; COST: 0.47; DEV_NAME: CP_1206MP/T; INST_NAME: fpga_vcco_large(1); LIBNAME: rc-master-smd; MFGR: AVX; PARTNUMBER: 478-1655-1-ND; PKG_TYPE: C1206MP/T; REFPREFIX: C; SUPPLIER: DIGI-KEY; VOLTAGE: 16v
C30 = rc-master-smd; COST: 0.47; DEV_NAME: CP_1206MP/T; INST_NAME: fpga_vcco_large(2); LIBNAME: rc-master-smd; MFGR: AVX; PARTNUMBER: 478-1655-1-ND; PKG_TYPE: C1206MP/T; REFPREFIX: C; SUPPLIER: DIGI-KEY; VOLTAGE: 16v
C31 = rc-master-smd; COST: 0.47; DEV_NAME: CP_1206MP/T; INST_NAME: fpga_vcco_large(3); LIBNAME: rc-master-smd; MFGR: AVX; PARTNUMBER: 478-1655-1-ND; PKG_TYPE: C1206MP/T; REFPREFIX: C; SUPPLIER: DIGI-KEY; VOLTAGE: 16v
C32 = rc-master-smd; COST: 0.47; DEV_NAME: CP_1206MP/T; INST_NAME: fpga_vccaux_large(1); LIBNAME: rc-master-smd; MFGR: AVX; PARTNUMBER: 478-1655-1-ND; PKG_TYPE: C1206MP/T; REFPREFIX: C; SUPPLIER: DIGI-KEY; VOLTAGE: 16v
C33 = rc-master-smd; COST: 0.47; DEV_NAME: CP_1206MP/T; INST_NAME: fpga_vccaux_large(2); LIBNAME: rc-master-smd; MFGR: AVX; PARTNUMBER: 478-1655-1-ND; PKG_TYPE: C1206MP/T; REFPREFIX: C; SUPPLIER: DIGI-KEY; VOLTAGE: 16v
C34 = rc-master-smd; COST: 0.47; DEV_NAME: CP_1206MP/T; INST_NAME: fpga_vccint_large(1); LIBNAME: rc-master-smd; MFGR: AVX; PARTNUMBER: 478-1655-1-ND; PKG_TYPE: C1206MP/T; REFPREFIX: C; SUPPLIER: DIGI-KEY; VOLTAGE: 16v
C35 = rc-master-smd; COST: 0.47; DEV_NAME: CP_1206MP/T; INST_NAME: fpga_vccint_large(2); LIBNAME: rc-master-smd; MFGR: AVX; PARTNUMBER: 478-1655-1-ND; PKG_TYPE: C1206MP/T; REFPREFIX: C; SUPPLIER: DIGI-KEY; VOLTAGE: 16v
C36 = rc-master-smd; COST: 0.12; DEV_NAME: C0603; INST_NAME: mem_cap(1); LIBNAME: rc-master-smd; MFGR: TDK; PARTNUMBER: 445-1313-1-ND; PKG_TYPE: C0603MP; REFPREFIX: C; SUPPLIER: DIGI-KEY; VOLTAGE: 50v
C37 = rc-master-smd; COST: 0.12; DEV_NAME: C0603; INST_NAME: mem_cap(2); LIBNAME: rc-master-smd; MFGR: TDK; PARTNUMBER: 445-1313-1-ND; PKG_TYPE: C0603MP; REFPREFIX: C; SUPPLIER: DIGI-KEY; VOLTAGE: 50v
C38 = rc-master-smd; COST: 0.12; DEV_NAME: C0603; INST_NAME: mem_cap(3); LIBNAME: rc-master-smd; MFGR: TDK; PARTNUMBER: 445-1313-1-ND; PKG_TYPE: C0603MP; REFPREFIX: C; SUPPLIER: DIGI-KEY; VOLTAGE: 50v
C39 = rc-master-smd; COST: 0.12; DEV_NAME: C0603; INST_NAME: mem_cap(4); LIBNAME: rc-master-smd; MFGR: TDK; PARTNUMBER: 445-1313-1-ND; PKG_TYPE: C0603MP; REFPREFIX: C; SUPPLIER: DIGI-KEY; VOLTAGE: 50v
C40 = rc-master-smd; COST: 0.12; DEV_NAME: C0603; INST_NAME: mem_cap(5); LIBNAME: rc-master-smd; MFGR: TDK; PARTNUMBER: 445-1313-1-ND; PKG_TYPE: C0603MP; REFPREFIX: C; SUPPLIER: DIGI-KEY; VOLTAGE: 50v
C41 = rc-master-smd; COST: 0.12; DEV_NAME: C0603; INST_NAME: mem_cap(6); LIBNAME: rc-master-smd; MFGR: TDK; PARTNUMBER: 445-1313-1-ND; PKG_TYPE: C0603MP; REFPREFIX: C; SUPPLIER: DIGI-KEY; VOLTAGE: 50v
C42 = rc-master-smd; COST: 0.12; DEV_NAME: C0603; INST_NAME: mem_cap(7); LIBNAME: rc-master-smd; MFGR: TDK; PARTNUMBER: 445-1313-1-ND; PKG_TYPE: C0603MP; REFPREFIX: C; SUPPLIER: DIGI-KEY; VOLTAGE: 50v
C43 = rc-master-smd; COST: 0.12; DEV_NAME: C0603; INST_NAME: mem_cap(8); LIBNAME: rc-master-smd; MFGR: TDK; PARTNUMBER: 445-1313-1-ND; PKG_TYPE: C0603MP; REFPREFIX: C; SUPPLIER: DIGI-KEY; VOLTAGE: 50v
C44 = rc-master-smd; COST: 0.08; DEV_NAME: C0603; INST_NAME: clk_cap; LIBNAME: rc-master-smd; MFGR: TDK; PARTNUMBER: 445-1311-1-ND; PKG_TYPE: C0603MP; REFPREFIX: C; SUPPLIER: DIGI-KEY; VOLTAGE: 50v
C45 = rc-master-smd; COST: 0.12; DEV_NAME: C0603; INST_NAME: flash_cap(1); LIBNAME: rc-master-smd; MFGR: TDK; PARTNUMBER: 445-1313-1-ND; PKG_TYPE: C0603MP; REFPREFIX: C; SUPPLIER: DIGI-KEY; VOLTAGE: 50v
C46 = rc-master-smd; COST: 0.12; DEV_NAME: C0603; INST_NAME: flash_cap(2); LIBNAME: rc-master-smd; MFGR: TDK; PARTNUMBER: 445-1313-1-ND; PKG_TYPE: C0603MP; REFPREFIX: C; SUPPLIER: DIGI-KEY; VOLTAGE: 50v
C47 = rc-master-smd; COST: 0.12; DEV_NAME: C0603; INST_NAME: flash_cap(3); LIBNAME: rc-master-smd; MFGR: TDK; PARTNUMBER: 445-1313-1-ND; PKG_TYPE: C0603MP; REFPREFIX: C; SUPPLIER: DIGI-KEY; VOLTAGE: 50v
C48 = rc-master-smd; COST: 0.035; DEV_NAME: C0603; INST_NAME: dac_cap; LIBNAME: rc-master-smd; MFGR: Yageo; PARTNUMBER: 311-1344-1-ND; PKG_TYPE: C0603MP; REFPREFIX: C; SUPPLIER: DIGI-KEY; VOLTAGE: 50v
C49 = rc-master-smd; COST: 0.035; DEV_NAME: C0603; INST_NAME: enc_cap; LIBNAME: rc-master-smd; MFGR: Yageo; PARTNUMBER: 311-1344-1-ND; PKG_TYPE: C0603MP; REFPREFIX: C; SUPPLIER: DIGI-KEY; VOLTAGE: 50v
C50 = rc-master-smd; COST: 0.035; DEV_NAME: C0603; INST_NAME: sense_cap; LIBNAME: rc-master-smd; MFGR: Yageo; PARTNUMBER: 311-1344-1-ND; PKG_TYPE: C0603MP; REFPREFIX: C; SUPPLIER: DIGI-KEY; VOLTAGE: 50v
C51 = rc-master-smd; COST: 0.38; DEV_NAME: CP_1206MP/T; INST_NAME: fet_driver_cap(1); LIBNAME: rc-master-smd; MFGR: AVX; PARTNUMBER: 478-1668-1-ND; PKG_TYPE: C1206MP/T; REFPREFIX: C; SUPPLIER: DIGI-KEY; VOLTAGE: 20v
C52 = rc-master-smd; COST: 0.38; DEV_NAME: CP_1206MP/T; INST_NAME: fet_driver_cap(2); LIBNAME: rc-master-smd; MFGR: AVX; PARTNUMBER: 478-1668-1-ND; PKG_TYPE: C1206MP/T; REFPREFIX: C; SUPPLIER: DIGI-KEY; VOLTAGE: 20v
C53 = rc-master-smd; COST: 0.38; DEV_NAME: CP_1206MP/T; INST_NAME: fet_driver_cap(3); LIBNAME: rc-master-smd; MFGR: AVX; PARTNUMBER: 478-3857-1-ND; PKG_TYPE: C1206MP/T; REFPREFIX: C; SUPPLIER: DIGI-KEY; VOLTAGE: 25v
C54 = rc-master-smd; COST: 0.38; DEV_NAME: CP_1206MP/T; INST_NAME: fet_driver_cap(4); LIBNAME: rc-master-smd; MFGR: AVX; PARTNUMBER: 478-3857-1-ND; PKG_TYPE: C1206MP/T; REFPREFIX: C; SUPPLIER: DIGI-KEY; VOLTAGE: 25v
C55 = rc-master-smd; COST: 0.10; DEV_NAME: C0603; INST_NAME: rfsh_cap(1); LIBNAME: rc-master-smd; MFGR: TDK; PARTNUMBER: 445-1307-1-ND; PKG_TYPE: C0603MP; REFPREFIX: C; SUPPLIER: DIGI-KEY; VOLTAGE: 50v
C56 = rc-master-smd; COST: 0.10; DEV_NAME: C0603; INST_NAME: rfsh_cap(2); LIBNAME: rc-master-smd; MFGR: TDK; PARTNUMBER: 445-1307-1-ND; PKG_TYPE: C0603MP; REFPREFIX: C; SUPPLIER: DIGI-KEY; VOLTAGE: 50v
C57 = rc-master-smd; COST: 0.31; DEV_NAME: C0603; INST_NAME: bldc_boot_cap(1); LIBNAME: rc-master-smd; MFGR: Murata; PARTNUMBER: 490-5402-1-ND; PKG_TYPE: C0603MP; REFPREFIX: C; SUPPLIER: DIGI-KEY; VOLTAGE: 50v
C58 = rc-master-smd; COST: 0.31; DEV_NAME: C0603; INST_NAME: bldc_boot_cap(2); LIBNAME: rc-master-smd; MFGR: Murata; PARTNUMBER: 490-5402-1-ND; PKG_TYPE: C0603MP; REFPREFIX: C; SUPPLIER: DIGI-KEY; VOLTAGE: 50v
C59 = rc-master-smd; COST: 0.31; DEV_NAME: C0603; INST_NAME: bldc_boot_cap(3); LIBNAME: rc-master-smd; MFGR: Murata; PARTNUMBER: 490-5402-1-ND; PKG_TYPE: C0603MP; REFPREFIX: C; SUPPLIER: DIGI-KEY; VOLTAGE: 50v
C60 = rc-master-smd; COST: 0.31; DEV_NAME: C0603; INST_NAME: bldc_boot_cap(4); LIBNAME: rc-master-smd; MFGR: Murata; PARTNUMBER: 490-5402-1-ND; PKG_TYPE: C0603MP; REFPREFIX: C; SUPPLIER: DIGI-KEY; VOLTAGE: 50v
C61 = rc-master-smd; COST: 0.31; DEV_NAME: C0603; INST_NAME: bldc_boot_cap(5); LIBNAME: rc-master-smd; MFGR: Murata; PARTNUMBER: 490-5402-1-ND; PKG_TYPE: C0603MP; REFPREFIX: C; SUPPLIER: DIGI-KEY; VOLTAGE: 50v
C62 = rc-master-smd; COST: 0.31; DEV_NAME: C0603; INST_NAME: bldc_boot_cap(6); LIBNAME: rc-master-smd; MFGR: Murata; PARTNUMBER: 490-5402-1-ND; PKG_TYPE: C0603MP; REFPREFIX: C; SUPPLIER: DIGI-KEY; VOLTAGE: 50v
C63 = rc-master-smd; COST: 0.08; DEV_NAME: C0603; INST_NAME: bridge_boot(1); LIBNAME: rc-master-smd; MFGR: TDK; PARTNUMBER: 445-1311-1-ND; PKG_TYPE: C0603MP; REFPREFIX: C; SUPPLIER: DIGI-KEY; VOLTAGE: 50v
C64 = rc-master-smd; COST: 0.08; DEV_NAME: C0603; INST_NAME: bridge_boot(2); LIBNAME: rc-master-smd; MFGR: TDK; PARTNUMBER: 445-1311-1-ND; PKG_TYPE: C0603MP; REFPREFIX: C; SUPPLIER: DIGI-KEY; VOLTAGE: 50v
C65 = rc-master-smd; COST: 0.08; DEV_NAME: C0603; INST_NAME: bridge_boot(3); LIBNAME: rc-master-smd; MFGR: TDK; PARTNUMBER: 445-1311-1-ND; PKG_TYPE: C0603MP; REFPREFIX: C; SUPPLIER: DIGI-KEY; VOLTAGE: 50v
C66 = rc-master-smd; COST: 0.08; DEV_NAME: C0603; INST_NAME: bridge_boot(4); LIBNAME: rc-master-smd; MFGR: TDK; PARTNUMBER: 445-1311-1-ND; PKG_TYPE: C0603MP; REFPREFIX: C; SUPPLIER: DIGI-KEY; VOLTAGE: 50v
C67 = rc-master-smd; COST: 0.82; DEV_NAME: CSV-E/F; INST_NAME: motor_power_caps(1); LIBNAME: rc-master-smd; MFGR: Panasonic; PARTNUMBER: PCE3946CT-ND; PKG_TYPE: CSV-E/F; REFPREFIX: C; SUPPLIER: DIGI-KEY; VOLTAGE: 63v
C68 = rc-master-smd; COST: 0.82; DEV_NAME: CSV-E/F; INST_NAME: motor_power_caps(2); LIBNAME: rc-master-smd; MFGR: Panasonic; PARTNUMBER: PCE3946CT-ND; PKG_TYPE: CSV-E/F; REFPREFIX: C; SUPPLIER: DIGI-KEY; VOLTAGE: 63v
C69 = rc-master-smd; COST: 0.82; DEV_NAME: CSV-E/F; INST_NAME: motor_power_caps(3); LIBNAME: rc-master-smd; MFGR: Panasonic; PARTNUMBER: PCE3946CT-ND; PKG_TYPE: CSV-E/F; REFPREFIX: C; SUPPLIER: DIGI-KEY; VOLTAGE: 63v
C70 = rc-master-smd; COST: 0.82; DEV_NAME: CSV-E/F; INST_NAME: motor_power_caps(4); LIBNAME: rc-master-smd; MFGR: Panasonic; PARTNUMBER: PCE3946CT-ND; PKG_TYPE: CSV-E/F; REFPREFIX: C; SUPPLIER: DIGI-KEY; VOLTAGE: 63v
C71 = rc-master-smd; COST: 0.82; DEV_NAME: CSV-E/F; INST_NAME: motor_power_caps(5); LIBNAME: rc-master-smd; MFGR: Panasonic; PARTNUMBER: PCE3946CT-ND; PKG_TYPE: CSV-E/F; REFPREFIX: C; SUPPLIER: DIGI-KEY; VOLTAGE: 63v
C72 = rc-master-smd; COST: 0.82; DEV_NAME: CSV-E/F; INST_NAME: motor_power_caps(6); LIBNAME: rc-master-smd; MFGR: Panasonic; PARTNUMBER: PCE3946CT-ND; PKG_TYPE: CSV-E/F; REFPREFIX: C; SUPPLIER: DIGI-KEY; VOLTAGE: 63v
C73 = rc-master-smd; COST: 0.035; DEV_NAME: C0603; INST_NAME: conv_cap(1); LIBNAME: rc-master-smd; MFGR: Yageo; PARTNUMBER: 311-1344-1-ND; PKG_TYPE: C0603MP; REFPREFIX: C; SUPPLIER: DIGI-KEY; VOLTAGE: 50v
C74 = rc-master-smd; COST: 0.035; DEV_NAME: C0603; INST_NAME: conv_cap(2); LIBNAME: rc-master-smd; MFGR: Yageo; PARTNUMBER: 311-1344-1-ND; PKG_TYPE: C0603MP; REFPREFIX: C; SUPPLIER: DIGI-KEY; VOLTAGE: 50v
C75 = rc-master-smd; COST: 0.035; DEV_NAME: C0603; INST_NAME: conv_cap(3); LIBNAME: rc-master-smd; MFGR: Yageo; PARTNUMBER: 311-1344-1-ND; PKG_TYPE: C0603MP; REFPREFIX: C; SUPPLIER: DIGI-KEY; VOLTAGE: 50v
C76 = rc-master-smd; COST: 0.035; DEV_NAME: C0603; INST_NAME: conv_cap(4); LIBNAME: rc-master-smd; MFGR: Yageo; PARTNUMBER: 311-1344-1-ND; PKG_TYPE: C0603MP; REFPREFIX: C; SUPPLIER: DIGI-KEY; VOLTAGE: 50v
C77 = rc-master-smd; COST: 0.035; DEV_NAME: C0603; INST_NAME: conv_cap(5); LIBNAME: rc-master-smd; MFGR: Yageo; PARTNUMBER: 311-1344-1-ND; PKG_TYPE: C0603MP; REFPREFIX: C; SUPPLIER: DIGI-KEY; VOLTAGE: 50v
C78 = rc-master-smd; COST: 0.63; DEV_NAME: CSV-D; INST_NAME: 12v_pcap(1); LIBNAME: rc-master-smd; MFGR: Panasonic; PARTNUMBER: PCE3898CT-ND; PKG_TYPE: CSV-D; REFPREFIX: C; SUPPLIER: DIGI-KEY; VOLTAGE: 25v
C79 = rc-master-smd; COST: 0.63; DEV_NAME: CSV-D; INST_NAME: 12v_pcap(2); LIBNAME: rc-master-smd; MFGR: Panasonic; PARTNUMBER: PCE3898CT-ND; PKG_TYPE: CSV-D; REFPREFIX: C; SUPPLIER: DIGI-KEY; VOLTAGE: 25v
C80 = rc-master-smd; COST: 0.63; DEV_NAME: CSV-D; INST_NAME: 5v_pcap(1); LIBNAME: rc-master-smd; MFGR: Panasonic; PARTNUMBER: PCE3898CT-ND; PKG_TYPE: CSV-D; REFPREFIX: C; SUPPLIER: DIGI-KEY; VOLTAGE: 25v
C81 = rc-master-smd; COST: 0.63; DEV_NAME: CSV-D; INST_NAME: 5v_pcap(2); LIBNAME: rc-master-smd; MFGR: Panasonic; PARTNUMBER: PCE3898CT-ND; PKG_TYPE: CSV-D; REFPREFIX: C; SUPPLIER: DIGI-KEY; VOLTAGE: 25v
C82 = rc-master-smd; COST: 0.16; DEV_NAME: C0603; INST_NAME: 5v_reg_cap(1); LIBNAME: rc-master-smd; MFGR: TDK; PARTNUMBER: 445-5093-1-ND; PKG_TYPE: C0603MP; REFPREFIX: C; SUPPLIER: DIGI-KEY; VOLTAGE: 50v
C83 = rc-master-smd; COST: 0.035; DEV_NAME: C0603; INST_NAME: 5v_reg_cap(2); LIBNAME: rc-master-smd; MFGR: Yageo; PARTNUMBER: 311-1344-1-ND; PKG_TYPE: C0603MP; REFPREFIX: C; SUPPLIER: DIGI-KEY; VOLTAGE: 50v
C84 = rc-master-smd; COST: 0.49; DEV_NAME: CP_1206MP/T; INST_NAME: 3v3_cap(1); LIBNAME: rc-master-smd; MFGR: AVX; PARTNUMBER: 478-5798-1-ND; PKG_TYPE: C1206MP/T; REFPREFIX: C; SUPPLIER: DIGI-KEY; VOLTAGE: 10v
C85 = rc-master-smd; COST: 0.47; DEV_NAME: CP_1206MP/T; INST_NAME: 3v3_cap(2); LIBNAME: rc-master-smd; MFGR: AVX; PARTNUMBER: 478-1655-1-ND; PKG_TYPE: C1206MP/T; REFPREFIX: C; SUPPLIER: DIGI-KEY; VOLTAGE: 16v
C86 = rc-master-smd; COST: 0.47; DEV_NAME: CP_1206MP/T; INST_NAME: 3v3_cap(3); LIBNAME: rc-master-smd; MFGR: AVX; PARTNUMBER: 478-1655-1-ND; PKG_TYPE: C1206MP/T; REFPREFIX: C; SUPPLIER: DIGI-KEY; VOLTAGE: 16v
C87 = rc-master-smd; COST: 0.47; DEV_NAME: CP_1206MP/T; INST_NAME: 3v3_cap(4); LIBNAME: rc-master-smd; MFGR: AVX; PARTNUMBER: 478-1655-1-ND; PKG_TYPE: C1206MP/T; REFPREFIX: C; SUPPLIER: DIGI-KEY; VOLTAGE: 16v
C88 = rc-master-smd; COST: 0.63; DEV_NAME: CSV-D; INST_NAME: 3v3_pcap(1); LIBNAME: rc-master-smd; MFGR: Panasonic; PARTNUMBER: PCE3898CT-ND; PKG_TYPE: CSV-D; REFPREFIX: C; SUPPLIER: DIGI-KEY; VOLTAGE: 25v
C89 = rc-master-smd; COST: 0.63; DEV_NAME: CSV-D; INST_NAME: 3v3_pcap(2); LIBNAME: rc-master-smd; MFGR: Panasonic; PARTNUMBER: PCE3898CT-ND; PKG_TYPE: CSV-D; REFPREFIX: C; SUPPLIER: DIGI-KEY; VOLTAGE: 25v
C90 = rc-master-smd; COST: 0.49; DEV_NAME: CP_1206MP/T; INST_NAME: 2v5_cap(1); LIBNAME: rc-master-smd; MFGR: AVX; PARTNUMBER: 478-5798-1-ND; PKG_TYPE: C1206MP/T; REFPREFIX: C; SUPPLIER: DIGI-KEY; VOLTAGE: 10v
C91 = rc-master-smd; COST: 0.75; DEV_NAME: CP_1206MP/T; INST_NAME: 2v5_cap(2); LIBNAME: rc-master-smd; MFGR: AVX; PARTNUMBER: 478-1648-1-ND; PKG_TYPE: C1206MP/T; REFPREFIX: C; SUPPLIER: DIGI-KEY; VOLTAGE: 50v
C92 = rc-master-smd; COST: 0.47; DEV_NAME: CP_1206MP/T; INST_NAME: 2v5_cap(3); LIBNAME: rc-master-smd; MFGR: AVX; PARTNUMBER: 478-1655-1-ND; PKG_TYPE: C1206MP/T; REFPREFIX: C; SUPPLIER: DIGI-KEY; VOLTAGE: 16v
C93 = rc-master-smd; COST: 0.49; DEV_NAME: CP_1206MP/T; INST_NAME: 1v2_cap; LIBNAME: rc-master-smd; MFGR: AVX; PARTNUMBER: 478-5798-1-ND; PKG_TYPE: C1206MP/T; REFPREFIX: C; SUPPLIER: DIGI-KEY; VOLTAGE: 10v
C94 = rc-master-smd; COST: 0.08; DEV_NAME: C0603; INST_NAME: 1v2_reg_cap; LIBNAME: rc-master-smd; MFGR: TDK; PARTNUMBER: 445-1311-1-ND; PKG_TYPE: C0603MP; REFPREFIX: C; SUPPLIER: DIGI-KEY; VOLTAGE: 50v
D1 = diode; COST: 0.403; DATASHEET: doc/DS25002.pdf; DEV_NAME: DO214AC; INST_NAME: bldc_boot_diode(1); LIBNAME: diode; MFGR: Vishay; PARTNUMBER: US1D-E3/61TGICT-ND; PKG_TYPE: DO214AC; REFPREFIX: D; SUPPLIER: DIGI-KEY
D2 = diode; COST: 0.403; DATASHEET: doc/DS25002.pdf; DEV_NAME: DO214AC; INST_NAME: bldc_boot_diode(2); LIBNAME: diode; MFGR: Vishay; PARTNUMBER: US1D-E3/61TGICT-ND; PKG_TYPE: DO214AC; REFPREFIX: D; SUPPLIER: DIGI-KEY
D3 = diode; COST: 0.403; DATASHEET: doc/DS25002.pdf; DEV_NAME: DO214AC; INST_NAME: bldc_boot_diode(3); LIBNAME: diode; MFGR: Vishay; PARTNUMBER: US1D-E3/61TGICT-ND; PKG_TYPE: DO214AC; REFPREFIX: D; SUPPLIER: DIGI-KEY
D4 = diode; COST: 0.403; DATASHEET: doc/DS25002.pdf; DEV_NAME: DO214AC; INST_NAME: bldc_boot_diode(4); LIBNAME: diode; MFGR: Vishay; PARTNUMBER: US1D-E3/61TGICT-ND; PKG_TYPE: DO214AC; REFPREFIX: D; SUPPLIER: DIGI-KEY
D5 = diode; COST: 0.403; DATASHEET: doc/DS25002.pdf; DEV_NAME: DO214AC; INST_NAME: bldc_boot_diode(5); LIBNAME: diode; MFGR: Vishay; PARTNUMBER: US1D-E3/61TGICT-ND; PKG_TYPE: DO214AC; REFPREFIX: D; SUPPLIER: DIGI-KEY
D6 = diode; COST: 0.403; DATASHEET: doc/DS25002.pdf; DEV_NAME: DO214AC; INST_NAME: bldc_boot_diode(6); LIBNAME: diode; MFGR: Vishay; PARTNUMBER: US1D-E3/61TGICT-ND; PKG_TYPE: DO214AC; REFPREFIX: D; SUPPLIER: DIGI-KEY
D7 = diode; COST: 0.403; DATASHEET: doc/DS25002.pdf; DEV_NAME: DO214AC; INST_NAME: bldc_clamp(1); LIBNAME: diode; MFGR: Vishay; PARTNUMBER: US1D-E3/61TGICT-ND; PKG_TYPE: DO214AC; REFPREFIX: D; SUPPLIER: DIGI-KEY
D8 = diode; COST: 0.403; DATASHEET: doc/DS25002.pdf; DEV_NAME: DO214AC; INST_NAME: bldc_clamp(2); LIBNAME: diode; MFGR: Vishay; PARTNUMBER: US1D-E3/61TGICT-ND; PKG_TYPE: DO214AC; REFPREFIX: D; SUPPLIER: DIGI-KEY
D9 = diode; COST: 0.403; DATASHEET: doc/DS25002.pdf; DEV_NAME: DO214AC; INST_NAME: bldc_clamp(3); LIBNAME: diode; MFGR: Vishay; PARTNUMBER: US1D-E3/61TGICT-ND; PKG_TYPE: DO214AC; REFPREFIX: D; SUPPLIER: DIGI-KEY
D10 = diode; COST: 0.403; DATASHEET: doc/DS25002.pdf; DEV_NAME: DO214AC; INST_NAME: bldc_clamp(4); LIBNAME: diode; MFGR: Vishay; PARTNUMBER: US1D-E3/61TGICT-ND; PKG_TYPE: DO214AC; REFPREFIX: D; SUPPLIER: DIGI-KEY
D11 = diode; COST: 0.403; DATASHEET: doc/DS25002.pdf; DEV_NAME: DO214AC; INST_NAME: bldc_clamp(5); LIBNAME: diode; MFGR: Vishay; PARTNUMBER: US1D-E3/61TGICT-ND; PKG_TYPE: DO214AC; REFPREFIX: D; SUPPLIER: DIGI-KEY
D12 = diode; COST: 0.403; DATASHEET: doc/DS25002.pdf; DEV_NAME: DO214AC; INST_NAME: bldc_clamp(6); LIBNAME: diode; MFGR: Vishay; PARTNUMBER: US1D-E3/61TGICT-ND; PKG_TYPE: DO214AC; REFPREFIX: D; SUPPLIER: DIGI-KEY
D13 = diode; COST: 0.403; DATASHEET: doc/DS25002.pdf; DEV_NAME: DO214AC; INST_NAME: bldc_clamp(7); LIBNAME: diode; MFGR: Vishay; PARTNUMBER: US1D-E3/61TGICT-ND; PKG_TYPE: DO214AC; REFPREFIX: D; SUPPLIER: DIGI-KEY
D14 = diode; COST: 0.403; DATASHEET: doc/DS25002.pdf; DEV_NAME: DO214AC; INST_NAME: bldc_clamp(8); LIBNAME: diode; MFGR: Vishay; PARTNUMBER: US1D-E3/61TGICT-ND; PKG_TYPE: DO214AC; REFPREFIX: D; SUPPLIER: DIGI-KEY
D15 = diode; COST: 0.403; DATASHEET: doc/DS25002.pdf; DEV_NAME: DO214AC; INST_NAME: bldc_clamp(9); LIBNAME: diode; MFGR: Vishay; PARTNUMBER: US1D-E3/61TGICT-ND; PKG_TYPE: DO214AC; REFPREFIX: D; SUPPLIER: DIGI-KEY
D16 = diode; COST: 0.403; DATASHEET: doc/DS25002.pdf; DEV_NAME: DO214AC; INST_NAME: bldc_clamp(10); LIBNAME: diode; MFGR: Vishay; PARTNUMBER: US1D-E3/61TGICT-ND; PKG_TYPE: DO214AC; REFPREFIX: D; SUPPLIER: DIGI-KEY
D17 = diode; COST: 0.403; DATASHEET: doc/DS25002.pdf; DEV_NAME: DO214AC; INST_NAME: bldc_clamp(11); LIBNAME: diode; MFGR: Vishay; PARTNUMBER: US1D-E3/61TGICT-ND; PKG_TYPE: DO214AC; REFPREFIX: D; SUPPLIER: DIGI-KEY
D18 = diode; COST: 0.403; DATASHEET: doc/DS25002.pdf; DEV_NAME: DO214AC; INST_NAME: bldc_clamp(12); LIBNAME: diode; MFGR: Vishay; PARTNUMBER: US1D-E3/61TGICT-ND; PKG_TYPE: DO214AC; REFPREFIX: D; SUPPLIER: DIGI-KEY
H1 = holes; DEV_NAME: 3mm6_hole; INST_NAME: mounts(1); LIBNAME: holes; PKG_TYPE: 3,6; REFPREFIX: H
H2 = holes; DEV_NAME: 3mm6_hole; INST_NAME: mounts(2); LIBNAME: holes; PKG_TYPE: 3,6; REFPREFIX: H
H3 = holes; DEV_NAME: 3mm6_hole; INST_NAME: mounts(3); LIBNAME: holes; PKG_TYPE: 3,6; REFPREFIX: H
H4 = holes; DEV_NAME: 3mm6_hole; INST_NAME: mounts(4); LIBNAME: holes; PKG_TYPE: 3,6; REFPREFIX: H
J1 = pinhead; DEV_NAME: HDR_1X6; INST_NAME: pmod_hdr0; LIBNAME: pinhead; PKG_TYPE: 1X06/90; REFPREFIX: J
J2 = pinhead; DEV_NAME: HDR_1X6; INST_NAME: pmod_hdr1; LIBNAME: pinhead; PKG_TYPE: 1X06/90; REFPREFIX: J
J3 = con-headers-jp; DEV_NAME: HDR_2X3; INST_NAME: mode_sel; LIBNAME: con-headers-jp; PKG_TYPE: DIL-100-2X03; REFPREFIX: J
J4 = con-headers-jp; DEV_NAME: HDR_1X3; INST_NAME: hswap_sel; LIBNAME: con-headers-jp; PKG_TYPE: SIP-100-03-40; REFPREFIX: J
J5 = con-headers-jp; DEV_NAME: HDR_1X3; INST_NAME: rom_en; LIBNAME: con-headers-jp; PKG_TYPE: SIP-100-03-40; REFPREFIX: J
J6 = con-headers-jp; COST: 1.76; DEV_NAME: HDR_2X7; INST_NAME: jtag_par_iv_hdr; LIBNAME: con-headers-jp; PARTNUMBER: WM17469-ND; PKG_TYPE: 79107-14; REFPREFIX: J; SUPPLIER: DIGI-KEY
J7 = pinhead; DEV_NAME: HDR_1X6; INST_NAME: jtag_hdr; LIBNAME: pinhead; PKG_TYPE: 1X06/90; REFPREFIX: J
J8 = con-molex; DEV_NAME: HDR_1X2; INST_NAME: dac_hdr; LIBNAME: con-molex; PKG_TYPE: 70543-02; REFPREFIX: J
J9 = con-molex; COST: 1.43; DEV_NAME: HDR_1X5; INST_NAME: enc_hdrs(0); LIBNAME: con-molex; MFGR: Molex; PARTNUMBER: WM4803-ND; PKG_TYPE: 70543-05; REFPREFIX: J; SUPPLIER: DIGI-KEY
J10 = con-molex; COST: 1.43; DEV_NAME: HDR_1X5; INST_NAME: enc_hdrs(1); LIBNAME: con-molex; MFGR: Molex; PARTNUMBER: WM4803-ND; PKG_TYPE: 70543-05; REFPREFIX: J; SUPPLIER: DIGI-KEY
J11 = con-molex; COST: 1.43; DEV_NAME: HDR_1X5; INST_NAME: sense_hdrs(0); LIBNAME: con-molex; MFGR: Molex; PARTNUMBER: WM4803-ND; PKG_TYPE: 70543-05; REFPREFIX: J; SUPPLIER: DIGI-KEY
J12 = con-molex; COST: 1.43; DEV_NAME: HDR_1X5; INST_NAME: sense_hdrs(1); LIBNAME: con-molex; MFGR: Molex; PARTNUMBER: WM4803-ND; PKG_TYPE: 70543-05; REFPREFIX: J; SUPPLIER: DIGI-KEY
J13 = con-molex; DEV_NAME: HDR_1X3; INST_NAME: bldc_out(0); LIBNAME: con-molex; PKG_TYPE: 22-23-2031; REFPREFIX: J
J14 = con-molex; DEV_NAME: HDR_1X3; INST_NAME: bldc_out(1); LIBNAME: con-molex; PKG_TYPE: 22-23-2031; REFPREFIX: J
J15 = con-molex; DEV_NAME: HDR_1X2; INST_NAME: brushed_out(0); LIBNAME: con-molex; PKG_TYPE: 22-23-2021; REFPREFIX: J
J16 = con-molex; DEV_NAME: HDR_1X2; INST_NAME: brushed_out(1); LIBNAME: con-molex; PKG_TYPE: 22-23-2021; REFPREFIX: J
J17 = con-molex; DEV_NAME: HDR_1X2; INST_NAME: motor_power; LIBNAME: con-molex; PKG_TYPE: 22-23-2021; REFPREFIX: J
J18 = con-subd; COST: 1.00; DATASHEET: doc/ENG_CD_1734348_B1.pdf; DEV_NAME: SUBD9F; INST_NAME: rs232_port; LIBNAME: con-subd; MFGR: Amplite; PARTNUMBER: A35109-ND; PKG_TYPE: 09HP; REFPREFIX: J; SUPPLIER: DIGI-KEY
J19 = con-headers-jp; DEV_NAME: HDR_1X3; INST_NAME: rs232_aux_port; LIBNAME: con-headers-jp; PKG_TYPE: SIP-100-03-40; REFPREFIX: J
J20 = con-molex; DEV_NAME: HDR_1X2; INST_NAME: lanc; LIBNAME: con-molex; PKG_TYPE: 70543-02; REFPREFIX: J
J21 = con-jack; COST: 0.80; DATASHEET: doc/CUI_PJ-102B_Datasheet.pdf; DEV_NAME: DC_JACK; INST_NAME: 12vdc_in; LIBNAME: con-jack; MFGR: CUI; PARTNUMBER: CP-102B-ND; PKG_TYPE: DCJ0202; REFPREFIX: J; SUPPLIER: DIGI-KEY
LD0 = led; COST: 0.15; DEV_NAME: LD0603; INST_NAME: fpga_leds(0); LIBNAME: led; MFGR: OSRAM; PARTNUMBER: 475-2506-1-ND; PKG_TYPE: 0603MP; REFDES: LD0; REFPREFIX: LD; SUPPLIER: DIGI-KEY
LD1 = led; COST: 0.15; DEV_NAME: LD0603; INST_NAME: fpga_leds(1); LIBNAME: led; MFGR: OSRAM; PARTNUMBER: 475-2506-1-ND; PKG_TYPE: 0603MP; REFDES: LD1; REFPREFIX: LD; SUPPLIER: DIGI-KEY
LD2 = led; COST: 0.15; DEV_NAME: LD0603; INST_NAME: fpga_leds(2); LIBNAME: led; MFGR: OSRAM; PARTNUMBER: 475-2506-1-ND; PKG_TYPE: 0603MP; REFDES: LD2; REFPREFIX: LD; SUPPLIER: DIGI-KEY
LD3 = led; COST: 0.15; DEV_NAME: LD0603; INST_NAME: fpga_leds(3); LIBNAME: led; MFGR: OSRAM; PARTNUMBER: 475-2506-1-ND; PKG_TYPE: 0603MP; REFDES: LD3; REFPREFIX: LD; SUPPLIER: DIGI-KEY
LD4 = led; COST: 0.15; DEV_NAME: LD0603; INST_NAME: fpga_leds(4); LIBNAME: led; MFGR: OSRAM; PARTNUMBER: 475-2506-1-ND; PKG_TYPE: 0603MP; REFDES: LD4; REFPREFIX: LD; SUPPLIER: DIGI-KEY
LD5 = led; COST: 0.15; DEV_NAME: LD0603; INST_NAME: fpga_leds(5); LIBNAME: led; MFGR: OSRAM; PARTNUMBER: 475-2506-1-ND; PKG_TYPE: 0603MP; REFDES: LD5; REFPREFIX: LD; SUPPLIER: DIGI-KEY
LD6 = led; COST: 0.15; DEV_NAME: LD0603; INST_NAME: fpga_leds(6); LIBNAME: led; MFGR: OSRAM; PARTNUMBER: 475-2506-1-ND; PKG_TYPE: 0603MP; REFDES: LD6; REFPREFIX: LD; SUPPLIER: DIGI-KEY
LD7 = led; COST: 0.15; DEV_NAME: LD0603; INST_NAME: fpga_leds(7); LIBNAME: led; MFGR: OSRAM; PARTNUMBER: 475-2506-1-ND; PKG_TYPE: 0603MP; REFDES: LD7; REFPREFIX: LD; SUPPLIER: DIGI-KEY
LD8 = led; COST: 0.16; DEV_NAME: LD0603; INST_NAME: done_led; LIBNAME: led; MFGR: OSRAM; PARTNUMBER: 475-2709-1-ND; PKG_TYPE: 0603MP; REFPREFIX: LD; SUPPLIER: DIGI-KEY
LD9 = led; COST: 0.16; DEV_NAME: LD0603; INST_NAME: 5v_led; LIBNAME: led; MFGR: OSRAM; PARTNUMBER: 475-2709-1-ND; PKG_TYPE: 0603MP; REFPREFIX: LD; SUPPLIER: DIGI-KEY
LD10 = led; COST: 0.16; DEV_NAME: LD0603; INST_NAME: 3v3_led; LIBNAME: led; MFGR: OSRAM; PARTNUMBER: 475-2709-1-ND; PKG_TYPE: 0603MP; REFPREFIX: LD; SUPPLIER: DIGI-KEY
LD11 = led; COST: 0.16; DEV_NAME: LD0603; INST_NAME: 2v5_led; LIBNAME: led; MFGR: OSRAM; PARTNUMBER: 475-2709-1-ND; PKG_TYPE: 0603MP; REFPREFIX: LD; SUPPLIER: DIGI-KEY
Q1 = ref-packages-smd-ipc; COST: 1.56; DEV_NAME: TO252; INST_NAME: drive_fet(1); LIBNAME: ref-packages-smd-ipc; MFGR: Fairchild; PARTNUMBER: FDD3682CT-ND; PKG_TYPE: TO252; REFPREFIX: Q; SUPPLIER: DIGI-KEY
Q2 = ref-packages-smd-ipc; COST: 1.56; DEV_NAME: TO252; INST_NAME: drive_fet(2); LIBNAME: ref-packages-smd-ipc; MFGR: Fairchild; PARTNUMBER: FDD3682CT-ND; PKG_TYPE: TO252; REFPREFIX: Q; SUPPLIER: DIGI-KEY
Q3 = ref-packages-smd-ipc; COST: 1.56; DEV_NAME: TO252; INST_NAME: drive_fet(3); LIBNAME: ref-packages-smd-ipc; MFGR: Fairchild; PARTNUMBER: FDD3682CT-ND; PKG_TYPE: TO252; REFPREFIX: Q; SUPPLIER: DIGI-KEY
Q4 = ref-packages-smd-ipc; COST: 1.56; DEV_NAME: TO252; INST_NAME: drive_fet(4); LIBNAME: ref-packages-smd-ipc; MFGR: Fairchild; PARTNUMBER: FDD3682CT-ND; PKG_TYPE: TO252; REFPREFIX: Q; SUPPLIER: DIGI-KEY
Q5 = ref-packages-smd-ipc; COST: 1.56; DEV_NAME: TO252; INST_NAME: drive_fet(5); LIBNAME: ref-packages-smd-ipc; MFGR: Fairchild; PARTNUMBER: FDD3682CT-ND; PKG_TYPE: TO252; REFPREFIX: Q; SUPPLIER: DIGI-KEY
Q6 = ref-packages-smd-ipc; COST: 1.56; DEV_NAME: TO252; INST_NAME: drive_fet(6); LIBNAME: ref-packages-smd-ipc; MFGR: Fairchild; PARTNUMBER: FDD3682CT-ND; PKG_TYPE: TO252; REFPREFIX: Q; SUPPLIER: DIGI-KEY
Q7 = ref-packages-smd-ipc; COST: 1.56; DEV_NAME: TO252; INST_NAME: drive_fet(7); LIBNAME: ref-packages-smd-ipc; MFGR: Fairchild; PARTNUMBER: FDD3682CT-ND; PKG_TYPE: TO252; REFPREFIX: Q; SUPPLIER: DIGI-KEY
Q8 = ref-packages-smd-ipc; COST: 1.56; DEV_NAME: TO252; INST_NAME: drive_fet(8); LIBNAME: ref-packages-smd-ipc; MFGR: Fairchild; PARTNUMBER: FDD3682CT-ND; PKG_TYPE: TO252; REFPREFIX: Q; SUPPLIER: DIGI-KEY
Q9 = ref-packages-smd-ipc; COST: 1.56; DEV_NAME: TO252; INST_NAME: drive_fet(9); LIBNAME: ref-packages-smd-ipc; MFGR: Fairchild; PARTNUMBER: FDD3682CT-ND; PKG_TYPE: TO252; REFPREFIX: Q; SUPPLIER: DIGI-KEY
Q10 = ref-packages-smd-ipc; COST: 1.56; DEV_NAME: TO252; INST_NAME: drive_fet(10); LIBNAME: ref-packages-smd-ipc; MFGR: Fairchild; PARTNUMBER: FDD3682CT-ND; PKG_TYPE: TO252; REFPREFIX: Q; SUPPLIER: DIGI-KEY
Q11 = ref-packages-smd-ipc; COST: 1.56; DEV_NAME: TO252; INST_NAME: drive_fet(11); LIBNAME: ref-packages-smd-ipc; MFGR: Fairchild; PARTNUMBER: FDD3682CT-ND; PKG_TYPE: TO252; REFPREFIX: Q; SUPPLIER: DIGI-KEY